# EAGLE board axiom_beta_plugin_module_TE0714_SATA_v0.5-default.05d97cfb (EAGLE 7.7.0)
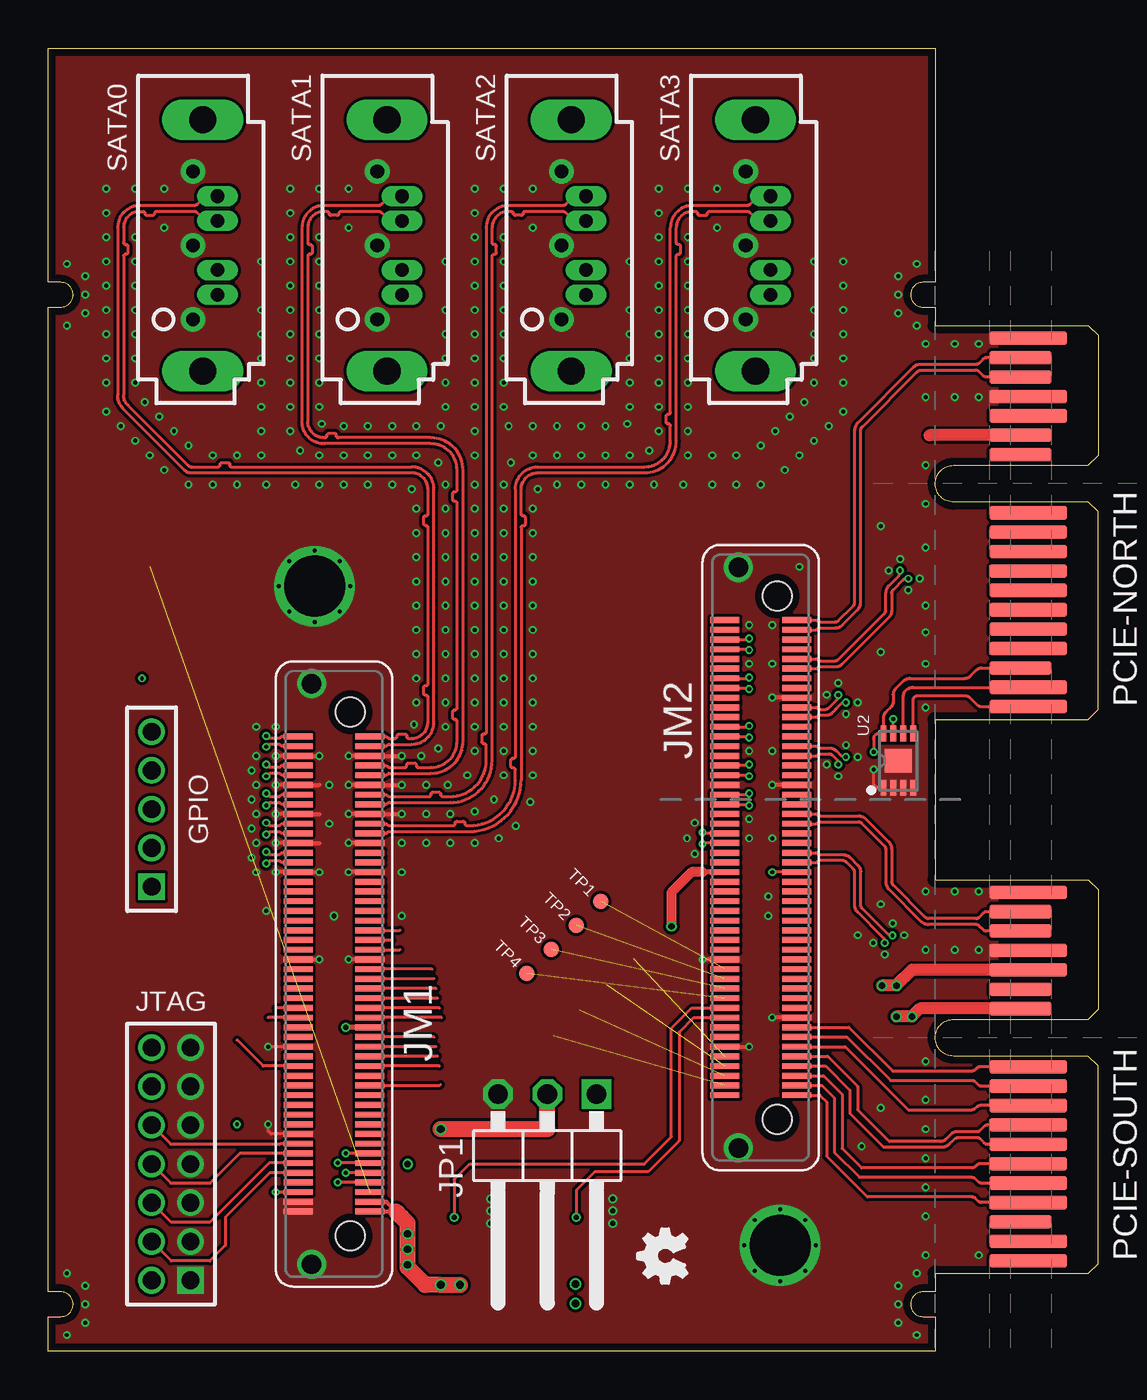
[diagram p0: board, top side]
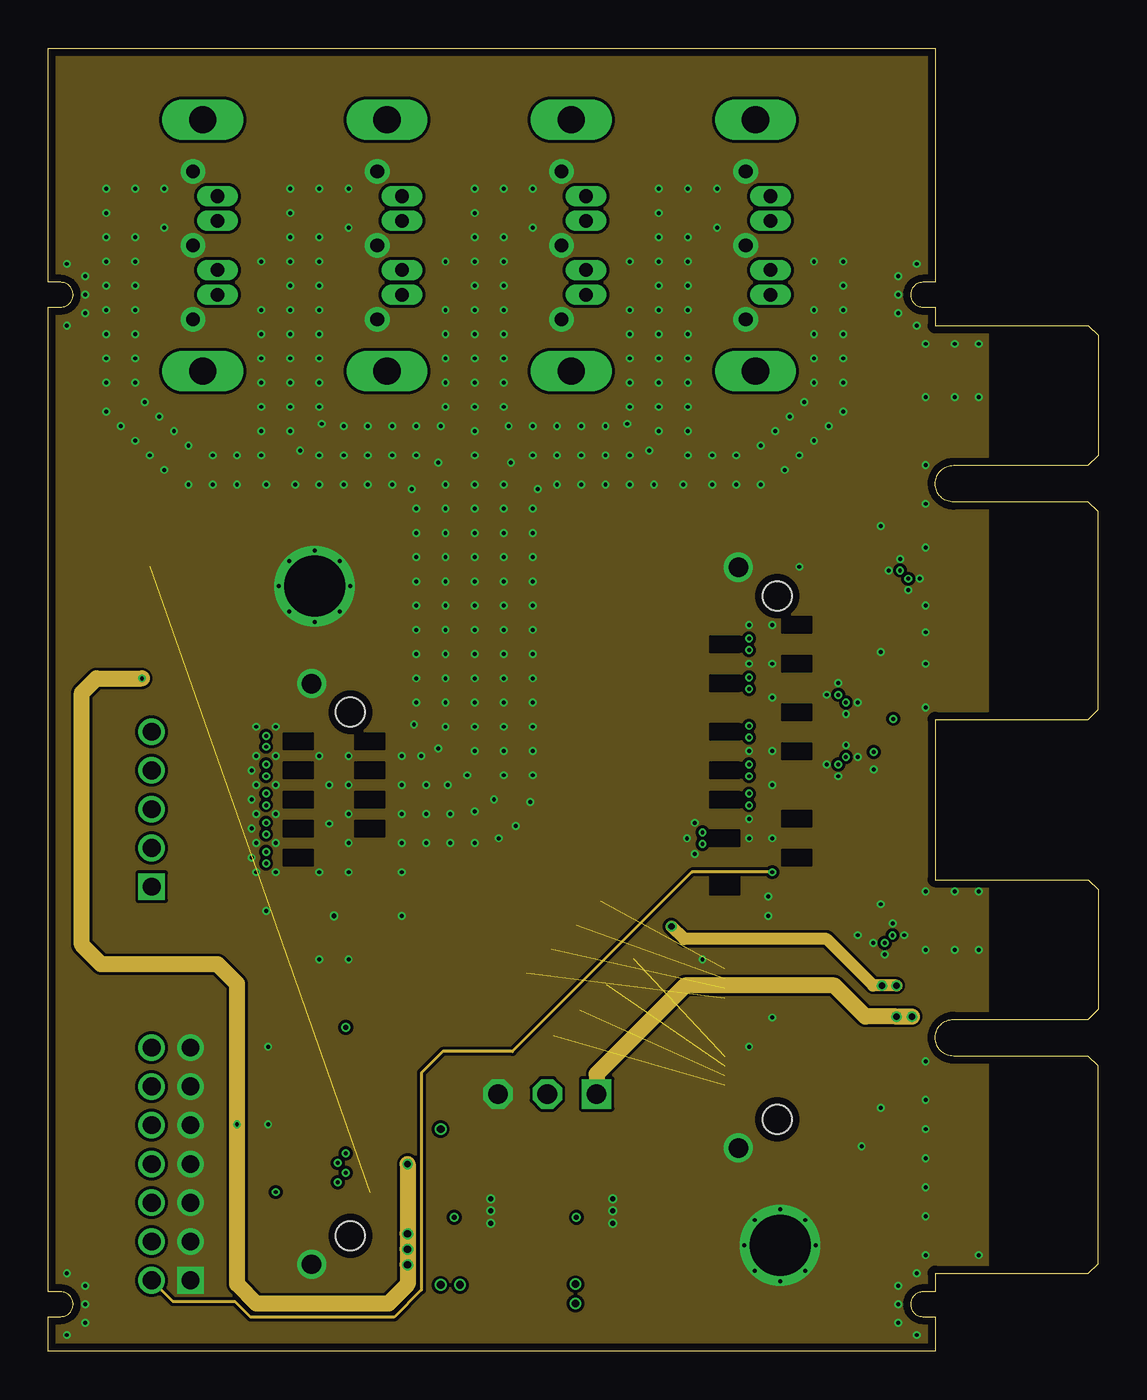
[diagram p1: board, inner layer Route2]
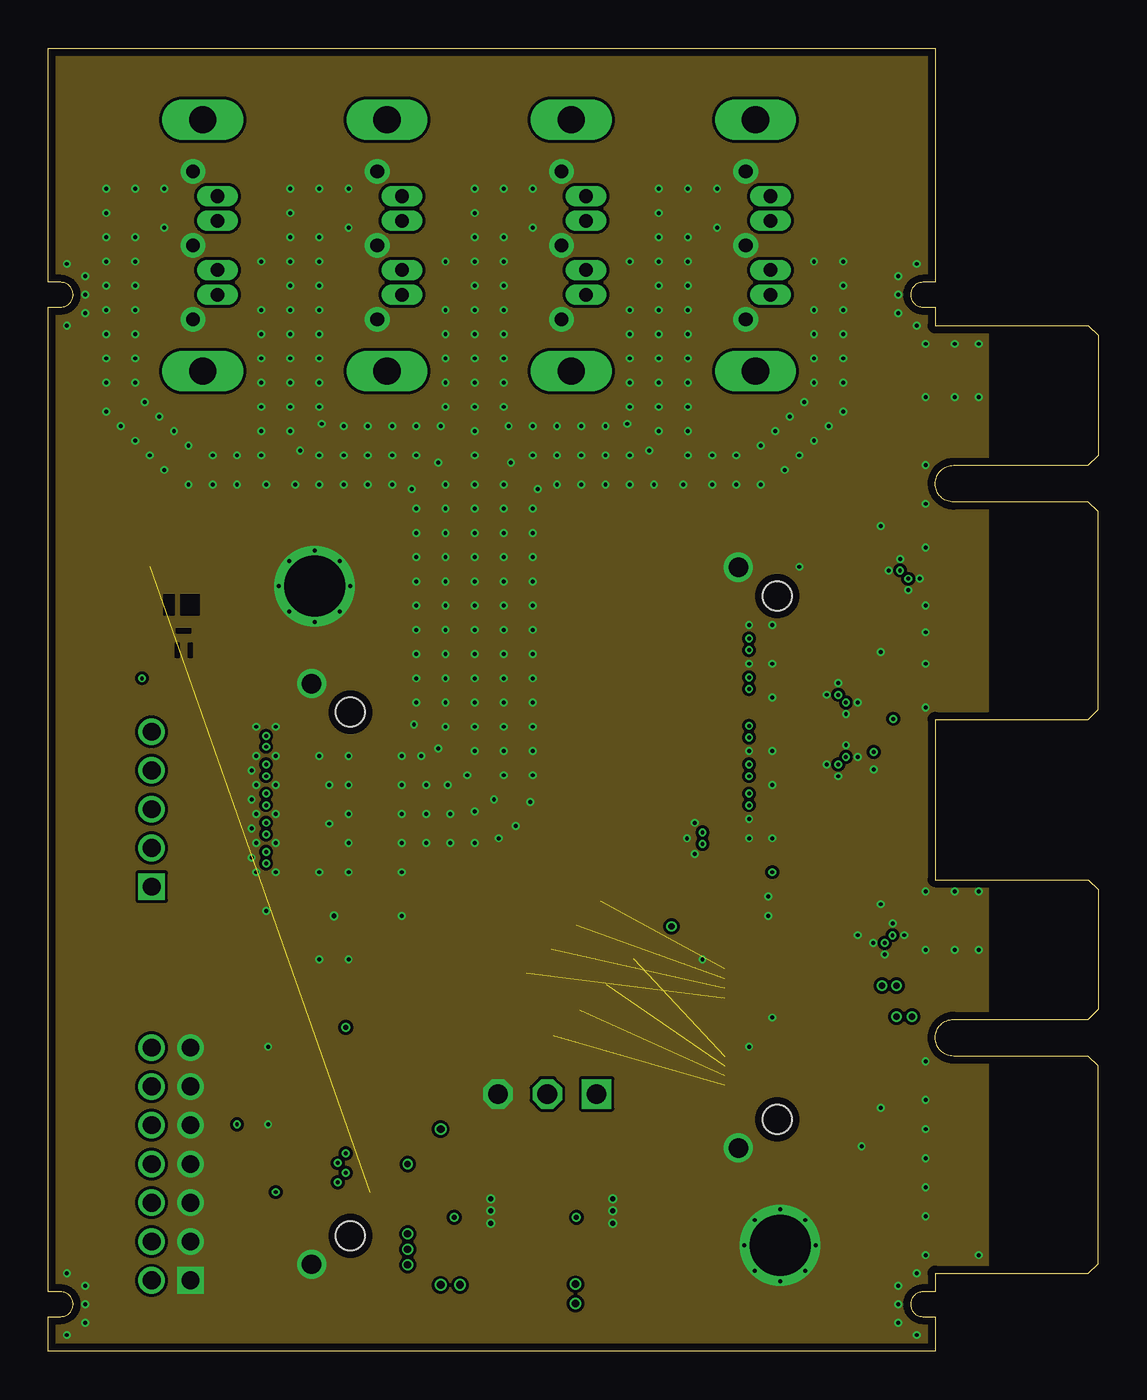
[diagram p2: board, inner layer Route15]
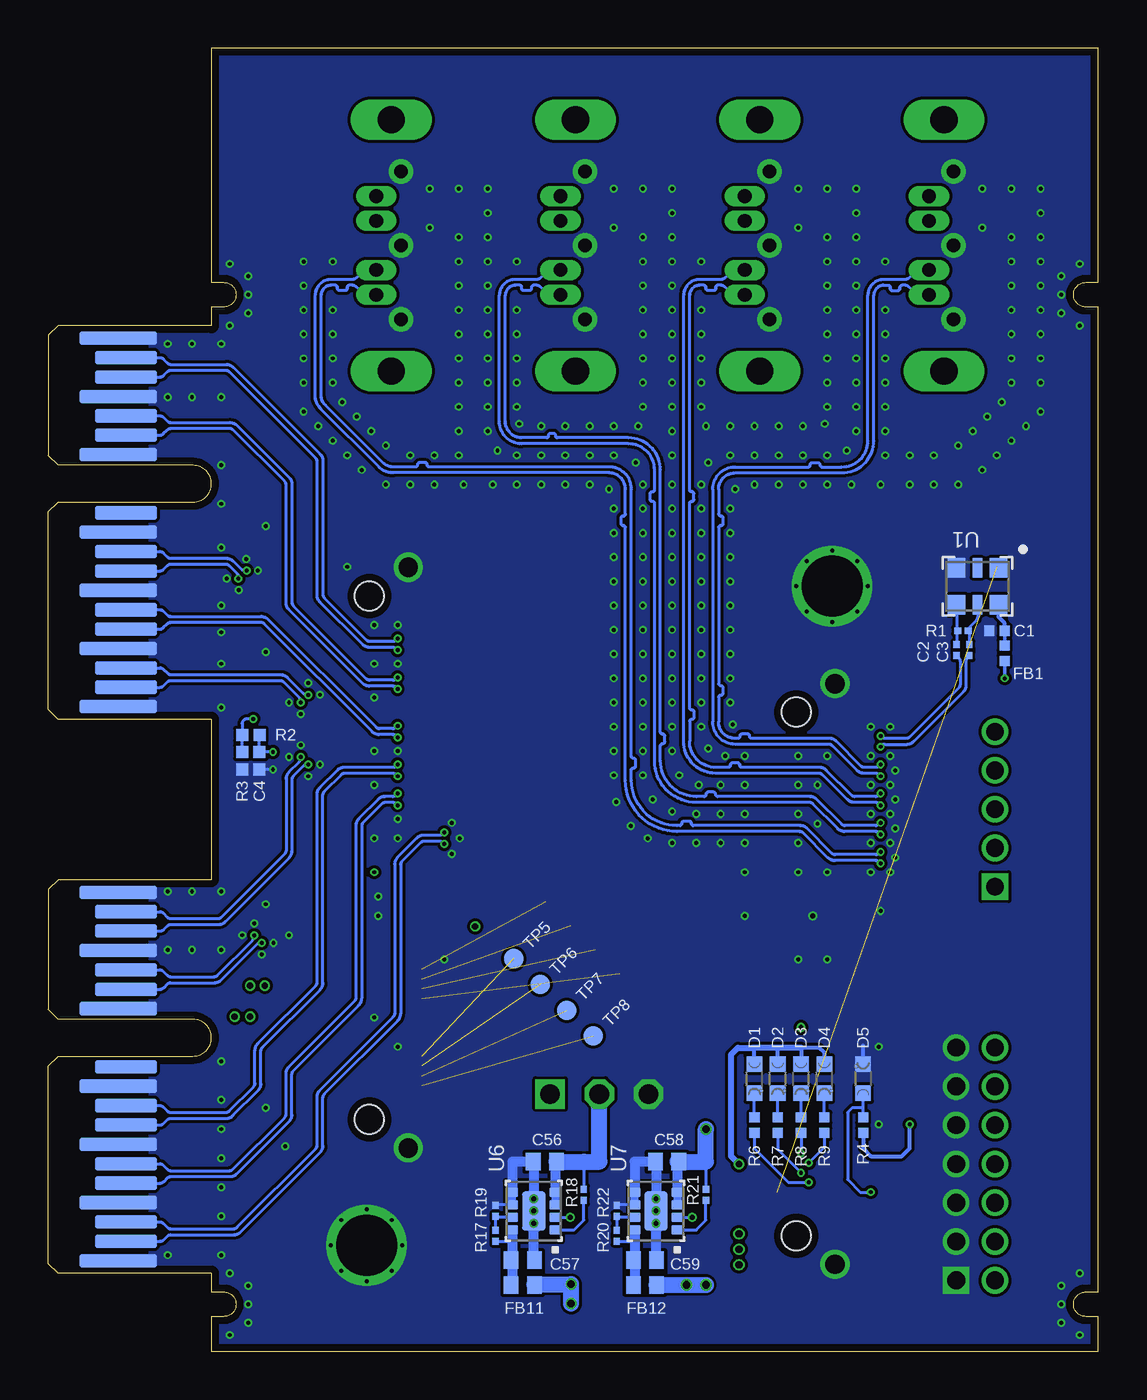
[diagram p3: board, bottom side, seen from below]

Size 54.12 x 67.18 mm. Coordinates in mm from the lower left corner, seen from the top.
Outline: 45.72,32.59 45.72,24.31
Outline: 45.72,52.89 45.72,53.85 45.09,53.85 arc-90 44.45,54.48 arc-90 45.09,55.12 45.72,55.12 45.72,67.18 0,67.18 0,55.12 0.63,55.12 arc-90 1.27,54.48 arc-90 0.63,53.85 0,53.85 0,3.05 0.63,3.05 arc-90 1.27,2.41 arc-90 0.63,1.78 0,1.78 0,0 45.72,0 45.72,1.78 45.09,1.78 arc-90 44.45,2.41 arc-90 45.09,3.05 45.72,3.05 45.72,4.01
Copper layers (1*2*15*16): Top 0.035559375mm / dielectric 0.17018125mm / Route2 0.01778125mm / dielectric 47mil / Route15 0.01778125mm / dielectric 0.17018125mm / Bottom 0.035559375mm
Design rules "OSHPark-4layer-tuned *": minimum track width 5mil, minimum drill 8mil, track to track 5mil, track to pad 5mil, pad to pad 5mil, via to via 5mil, smd to smd 5mil, copper to edge 15mil, drill to drill 6mil, minimum pad ring 4mil, minimum via ring 4mil, stop-mask expansion 2mil, vias tented up to drill 25mil, thermal gap 6mil
Net classes: 0 default: width 0.152 mm, drill 0.203 mm, clearance 0.152 mm; 1 LVDS: width 0.152 mm, drill 0.203 mm, clearance 0.152 mm; 2 75Ohm: width 0.178 mm, drill 0.203 mm, clearance 0.254 mm; 3 MGT: width 0.152 mm, drill 0.203 mm, clearance 0.356 mm
tKeepout: area 43.5,52.9 to 46.7,56.1; area 43.5,0.8 to 46.7,4; area -1,52.9 to 2.2,56.1; area -1,0.8 to 2.2,4
bKeepout: area 43.5,52.9 to 46.7,56.1; area 43.5,0.8 to 46.7,4; area -1,52.9 to 2.2,56.1; area -1,0.8 to 2.2,4

## Footprints (pad centres in the part's own frame; a part is rotated, then mirrored left to right if it is on the bottom)
0402-C = smd 0.52 x 0.52: 1 -0.4,0; 2 0.4,0
0201-C = smd 0.36 x 0.32: 1 -0.28,0; 2 0.28,0
0402-B = smd 0.62 x 0.62: 1 -0.45,0; 2 0.45,0
0603-C = smd 0.75 x 0.9: 1 -0.6,0; 2 0.6,0
CHIPLED_0603 = smd 0.8 x 0.8: A 0,-0.75; C 0,0.75
1X05M = drill 0.914 square: 1 -4,0 | drill 0.914: 2 -2,0; 3 0,0; 4 2,0; 5 4,0
LSHM-150-XX.X-XX-DV-A-S = smd 0.3 x 1.5: 1 12.25,-1.85; 2 12.25,1.85; 3 11.75,-1.85; 4 11.75,1.85; 5 11.25,-1.85; 6 11.25,1.85; 7 10.75,-1.85; 8 10.75,1.85; 9 10.25,-1.85; 10 10.25,1.85; 11 9.75,-1.85; 12 9.75,1.85; 13 9.25,-1.85; 14 9.25,1.85; 15 8.75,-1.85; 16 8.75,1.85; 17 8.25,-1.85; 18 8.25,1.85; 19 7.75,-1.85; 20 7.75,1.85; 21 7.25,-1.85; 22 7.25,1.85; 23 6.75,-1.85; 24 6.75,1.85; 25 6.25,-1.85; 26 6.25,1.85; 27 5.75,-1.85; 28 5.75,1.85; 29 5.25,-1.85; 30 5.25,1.85; 31 4.75,-1.85; 32 4.75,1.85; 33 4.25,-1.85; 34 4.25,1.85; 35 3.75,-1.85; 36 3.75,1.85; 37 3.25,-1.85; 38 3.25,1.85; 39 2.75,-1.85; 40 2.75,1.85; 41 2.25,-1.85; 42 2.25,1.85; 43 1.75,-1.85; 44 1.75,1.85; 45 1.25,-1.85; 46 1.25,1.85; 47 0.75,-1.85; 48 0.75,1.85; 49 0.25,-1.85; 50 0.25,1.85; 51 -0.25,-1.85; 52 -0.25,1.85; 53 -0.75,-1.85; 54 -0.75,1.85; 55 -1.25,-1.85; 56 -1.25,1.85; 57 -1.75,-1.85; 58 -1.75,1.85; 59 -2.25,-1.85; 60 -2.25,1.85; 61 -2.75,-1.85; 62 -2.75,1.85; 63 -3.25,-1.85; 64 -3.25,1.85; 65 -3.75,-1.85; 66 -3.75,1.85; 67 -4.25,-1.85; 68 -4.25,1.85; 69 -4.75,-1.85; 70 -4.75,1.85; 71 -5.25,-1.85; 72 -5.25,1.85; 73 -5.75,-1.85; 74 -5.75,1.85; 75 -6.25,-1.85; 76 -6.25,1.85; 77 -6.75,-1.85; 78 -6.75,1.85; 79 -7.25,-1.85; 80 -7.25,1.85; 81 -7.75,-1.85; 82 -7.75,1.85; 83 -8.25,-1.85; 84 -8.25,1.85; 85 -8.75,-1.85; 86 -8.75,1.85; 87 -9.25,-1.85; 88 -9.25,1.85; 89 -9.75,-1.85; 90 -9.75,1.85; 91 -10.25,-1.85; 92 -10.25,1.85; 93 -10.75,-1.85; 94 -10.75,1.85; 95 -11.25,-1.85; 96 -11.25,1.85; 97 -11.75,-1.85; 98 -11.75,1.85; 99 -12.25,-1.85; 100 -12.25,1.85 | drill 1 pad 1.5: F1 14.975,1.15; F2 -14.975,1.15 | hole 1.5: -13.5,-0.85; 13.5,-0.85
1X03/90-S = drill 1.016 square: 1 -2.54,-3.81 | drill 1.016 octagon: 2 0,-3.81; 3 2.54,-3.81
2X07M = drill 0.914 square: 1 -6,-1 | drill 0.914: 2 -6,1; 3 -4,-1; 4 -4,1; 5 -2,-1; 6 -2,1; 7 0,-1; 8 0,1; 9 2,-1; 10 2,1; 11 4,-1; 12 4,1; 13 6,-1; 14 6,1
PCIE-36-AXIOM = smd 0.7 x 4 bottom: A1 -11.5,3.6; A4 -8.5,3.6; A7 -5.5,3.6; A10 -2.5,3.6; A12 1.5,3.6; A15 4.5,3.6; A18 7.5,3.6 | smd 0.7 x 3.2 bottom: A2 -10.5,4; A3 -9.5,4; A5 -7.5,4; A6 -6.5,4; A8 -4.5,4; A9 -3.5,4; A11 -1.5,4; A13 2.5,4; A14 3.5,4; A16 5.5,4; A17 6.5,4 | smd 0.7 x 4: B1 -11.5,3.6; B2 -10.5,3.6; B4 -8.5,3.6; B5 -7.5,3.6; B6 -6.5,3.6; B7 -5.5,3.6; B8 -4.5,3.6; B9 -3.5,3.6; B10 -2.5,3.6; B11 -1.5,3.6; B14 3.5,3.6; B15 4.5,3.6; B18 7.5,3.6 | smd 0.7 x 3.2: B3 -9.5,4; B12 1.5,4; B13 2.5,4; B16 5.5,4; B17 6.5,4
SATA7-VERT = drill 0.7 pad 1.27: 1 3.81,-1.27; 4 0,-1.27; 7 -3.81,-1.27 | drill 0.7 pad 1 long: 2 2.54,0; 3 1.27,0; 5 -1.27,0; 6 -2.54,0 | drill 1.4 long: M1 -6.48,-0.77; M2 6.48,-0.77
TP08R = smd 0.8 x 0.8: TP 0,0
TP10R = smd 1 x 1: TP 0,0
3.2X2.5 = smd 0.9 x 1: 1 -1.075,-0.95; 3 1.075,-0.95; 4 1.075,0.95; 6 -1.075,0.95 | smd 0.5 x 1: 2 0,-0.95; 5 0,0.95
DFN200X300X100-9N = smd 0.813 x 0.305: 1 -1.397,0.762; 2 -1.397,0.254; 3 -1.397,-0.254; 4 -1.397,-0.762; 5 1.397,-0.762; 6 1.397,-0.254; 7 1.397,0.254; 8 1.397,0.762 | smd 1.194 x 1.397: EP 0,0
MICROSIP = smd 0.48 x 0.58: 1 -0.975,-1.1; 2 -0.325,-1.1; 3 0.325,-1.1; 4 0.975,-1.1; 5 0.975,1.1; 6 0.325,1.1; 7 -0.325,1.1; 8 -0.975,1.1 | smd 2 x 1.2: EP 0,0

## Placement (x,y rotation side)
C1  470n  [0402-C]  5.22,37.15 180 bottom
C2  100n  [0201-C]  7.3,36.15 270 bottom
C3  100n  [0201-C]  6.64,36.15 270 bottom
C4  [0402-B]  43.24,30.45 270 bottom
C56  [0603-C]  28.52,9.76 180 bottom
C57  [0603-C]  29.67,4.68 0 bottom
C58  [0603-C]  22.22,9.76 180 bottom
C59  [0603-C]  23.37,4.68 0 bottom
D1  LED  [CHIPLED_0603]  17.72,14.05 180 bottom
D2  LED  [CHIPLED_0603]  16.52,14.05 180 bottom
D3  LED  [CHIPLED_0603]  15.32,14.05 180 bottom
D4  LED  [CHIPLED_0603]  14.12,14.05 180 bottom
D5  LED  [CHIPLED_0603]  12.12,14.05 0 bottom
FB1  [0402-C]  4.82,36 90 bottom
FB11  [0603-C]  29.67,3.41 0 bottom
FB12  [0603-C]  23.37,3.41 0 bottom
GPIO  [1X05M]  5.32,27.95 90 top
JM1  LSHM-150-XX.X-XX-DV-A-S  [LSHM-150-XX.X-XX-DV-A-S]  14.72,19.45 90 top
JM2  LSHM-150-XX.X-XX-DV-A-S  [LSHM-150-XX.X-XX-DV-A-S]  36.72,25.45 90 top
JP1  [1X03/90-S]  25.72,9.45 180 top
JTAG  [2X07M]  6.32,9.65 90 top
LOGO2  OSHW_LOGO_FILLX0100-NT  [OSHW_FILLX100_NOTEXT]  32.92,3.49 90 top
PCIE-NORTH  PCIE-36-AXIOM  [PCIE-36-AXIOM]  54.12,44.74 90 top
PCIE-SOUTH  PCIE-36-AXIOM  [PCIE-36-AXIOM]  54.12,16.16 90 top
R1  100R  [0201-C]  6.97,37.15 0 bottom
R2  10k  [0402-B]  43.69,31.78 180 bottom
R3  1k  [0402-B]  44.13,30.45 270 bottom
R4  5k6  [0402-C]  12.12,11.65 270 bottom
R6  10k  [0402-C]  17.72,11.65 90 bottom
R7  10k  [0402-C]  16.52,11.65 90 bottom
R8  10k  [0402-C]  15.32,11.65 90 bottom
R9  10k  [0402-C]  14.12,11.65 90 bottom
R17  200k  [0201-C]  31.07,5.95 270 bottom
R18  10k  [0201-C]  26.52,8.05 90 bottom
R19  162k  [0201-C]  31.07,7.22 270 bottom
R20  510k  [0201-C]  24.82,5.95 270 bottom
R21  10k  [0201-C]  20.22,8.05 90 bottom
R22  162k  [0201-C]  24.82,7.22 270 bottom
SATA0  [SATA7-VERT]  8.72,57.02 270 top
SATA1  [SATA7-VERT]  18.22,57.02 270 top
SATA2  [SATA7-VERT]  27.72,57.02 270 top
SATA3  [SATA7-VERT]  37.22,57.02 270 top
TP1  TPTP08R  [TP08R]  28.47,23.18 0 top
TP2  TPTP08R  [TP08R]  27.2,21.95 0 top
TP3  TPTP08R  [TP08R]  25.93,20.72 0 top
TP4  TPTP08R  [TP08R]  24.66,19.49 0 top
TP5  TPTP10R  [TP10R]  30.14,20.24 0 bottom
TP6  TPTP10R  [TP10R]  28.77,18.91 0 bottom
TP7  TPTP10R  [TP10R]  27.4,17.58 0 bottom
TP8  TPTP10R  [TP10R]  26.03,16.25 0 bottom
U1  DSC11XX-3.2X2.5  [3.2X2.5]  6.22,39.45 180 bottom
U2  BR24G04NUX  [DFN200X300X100-9N]  43.81,30.45 90 top
U6  TPS82085  [MICROSIP]  29.1,7.22 90 bottom
U7  TPS82085  [MICROSIP]  22.8,7.22 90 bottom

## Library data of the parts
C1-C4 C56-C59 FB1 FB11 FB12 R1-R4 R6-R9 R17-R22 = generic-rcl
D1-D5 = led
GPIO JP1 JTAG = pinhead-2
JM1 JM2 = LSHM-150-XX.X-XX-DV-A-S
LOGO2 = ohw-logo
PCIE-NORTH PCIE-SOUTH = PCIe
SATA0 SATA1-SATA3 = sata
TP1-TP8 = testpad
U1 = dsc11xx
U2 = eeprom
U6 U7 = TPS82085

## Nets
1V8 [LVDS]: FB11.2
3V3 [LVDS]: D1.A D2.A D3.A D4.A FB1.1 FB12.2 JM1.97 JM1.99 R4.2
ADC_N: JM1.27
ADC_P: JM1.25
B14_L0: JM2.99 PCIE-SOUTH.B4
B14_L4_N: JM2.57
B14_L4_P: JM2.55
B14_L5_N: JM2.58
B14_L5_P: JM2.56
B14_L7_N: JM2.59
B14_L7_P: JM2.61
B14_L8_N: JM2.62
B14_L8_P: JM2.60
B14_L9_N: JM2.66
B14_L9_P: JM2.64
B14_L10_N: JM2.77
B14_L10_P: JM2.75
B14_L11_N: JM2.74 TP1.TP
B14_L11_P: JM2.76 TP2.TP
B14_L12_N: JM2.84 U6.2
B14_L12_P: JM2.82 U7.2
B14_L13_N: JM2.86
B14_L13_P: JM2.88
B14_L14_N: JM2.78 TP3.TP
B14_L14_P: JM2.80 TP4.TP
B14_L15_N: JM2.65
B14_L15_P: JM2.63
B14_L16_N: JM2.81
B14_L16_P: JM2.79
B14_L17_N: JM2.89 PCIE-SOUTH.B9
B14_L17_P: JM2.91 PCIE-SOUTH.B8
B14_L18_N: JM2.85 PCIE-SOUTH.B11
B14_L18_P: JM2.87 PCIE-SOUTH.B10
B14_L19_N: JM2.94 TP6.TP
B14_L19_P: JM2.92 TP5.TP
B14_L20_N: JM2.95 PCIE-SOUTH.B6
B14_L20_P: JM2.93 PCIE-SOUTH.B7
B14_L21_N: JM1.95 U1.1
B14_L21_P: JM1.93 R6.1
B14_L22_N: JM2.96 TP7.TP
B14_L22_P: JM2.98 TP8.TP
B14_L23_N: JM1.89 R9.1
B14_L23_P: JM1.91 R7.1
B14_L24_N: JM1.85
B14_L24_P: JM1.87 R8.1
B14_L25: JM2.97 PCIE-SOUTH.B5
B15_L1_N [LVDS]: JM2.14 PCIE-NORTH.A14
B15_L1_P [LVDS]: JM2.16 PCIE-NORTH.A13
B15_L2_N [LVDS]: JM2.20
B15_L2_P [LVDS]: JM2.22
B15_L3_N: JM2.4
B15_L3_P: JM2.2
B15_L4_N: JM2.10
B15_L4_P: JM2.12
B15_L5_N [LVDS]: JM2.8 PCIE-NORTH.A16
B15_L5_P [LVDS]: JM2.6 PCIE-NORTH.A17
B15_L6_N: JM2.26 PCIE-NORTH.A5
B15_L6_P: JM2.24 PCIE-NORTH.A6
B15_L7_N [LVDS]: JM2.1 PCIE-NORTH.B17
B15_L7_P [LVDS]: JM2.3 PCIE-NORTH.B16
B15_L8_N: JM2.7
B15_L8_P: JM2.5
B15_L9_N: JM2.15
B15_L9_P: JM2.13
B15_L10_N [LVDS]: JM2.11 PCIE-NORTH.A8
B15_L10_P [LVDS]: JM2.9 PCIE-NORTH.A9
B15_L11_N: JM2.30
B15_L11_P: JM2.28
B15_L12_N: JM2.34 PCIE-SOUTH.A8
B15_L12_P: JM2.32 PCIE-SOUTH.A9
B15_L13_N: JM2.38 PCIE-SOUTH.A6
B15_L13_P: JM2.40 PCIE-SOUTH.A5
B15_L14_N: JM2.42
B15_L14_P: JM2.44
B15_L15_N: JM2.19 PCIE-NORTH.A3
B15_L15_P: JM2.21 PCIE-NORTH.A2
B15_L16_N: JM2.23
B15_L16_P: JM2.25
B15_L17_N: JM2.31
B15_L17_P: JM2.33
B15_L18_N: JM2.27 PCIE-SOUTH.A17
B15_L18_P: JM2.29 PCIE-SOUTH.A16
B15_L19_N: JM2.41 PCIE-SOUTH.B17
B15_L19_P: JM2.43 PCIE-SOUTH.B16
B15_L20_N: JM2.50
B15_L20_P: JM2.52
B15_L21_N: JM2.45
B15_L21_P: JM2.47
B15_L22_N: JM2.46 PCIE-SOUTH.A3
B15_L22_P: JM2.48 PCIE-SOUTH.A2
B15_L23_N [LVDS]: JM2.51 PCIE-SOUTH.A13
B15_L23_P [LVDS]: JM2.49 PCIE-SOUTH.A14
B15_L24_N: JM2.37
B15_L24_P: JM2.39
B34_L1_N: JM1.37
B34_L1_P: JM1.35
B34_L2_N: JM1.33
B34_L2_P: JM1.31
B34_L3_N: JM1.42
B34_L3_P: JM1.40
B34_L4_N: JM1.41
B34_L4_P: JM1.39
B34_L5_N: JM1.45
B34_L5_P: JM1.43
B34_L6_N: JM1.34
B34_L6_P: JM1.32
B34_L7_N: JM1.38
B34_L7_P: JM1.36
B34_L8_N: JM1.52
B34_L8_P: JM1.50
B34_L9_N: JM1.46
B34_L9_P: JM1.44
B34_L10_N: JM1.51
B34_L10_P: JM1.49
B34_L11_N: JM1.53
B34_L11_P: JM1.55
B34_L12_N: JM1.57
B34_L12_P: JM1.59
B34_L13_N: JM1.56
B34_L13_P: JM1.54
B34_L14_N: JM1.60
B34_L14_P: JM1.58
B34_L15_N: JM1.62
B34_L15_P: JM1.64
B34_L16_N: JM1.68
B34_L16_P: JM1.70
B34_L17_N: JM1.63
B34_L17_P: JM1.65
B34_L18_N: JM1.74
B34_L18_P: JM1.72
B34_L19_N: JM1.71
B34_L19_P: JM1.73
B34_L20_N: JM1.76
B34_L20_P: JM1.78
B34_L21_N: JM1.69
B34_L21_P: JM1.67
B34_L22_N: JM1.75
B34_L22_P: JM1.77
B34_L23_N: JM1.79
B34_L23_P: JM1.81
B34_L24_N: JM1.80
B34_L24_P: JM1.82
BOOTMODE: JM2.100
DONE: D5.A JM1.96 R4.1
EN_A: R18.1 U6.1
EN_B: R21.1 U7.1
FB_A: R17.1 R19.2 U6.7
FB_B: R20.1 R22.2 U7.7
GND: C1.2 C4.2 C56.2 C57.2 C58.2 C59.2 D5.C JM1.5 JM1.6 JM1.11 JM1.12 JM1.17 JM1.18 JM1.23 JM1.24 JM1.29 JM1.30 JM1.47 JM1.48 JM1.66 JM1.84 JM1.98 JM1.100 JM1.F1 JM1.F2 JM2.17 JM2.35 JM2.36 JM2.72 JM2.83 JM2.90 JM2.F1 JM2.F2 JP1.3 JTAG.1 JTAG.3 JTAG.5 JTAG.7 JTAG.9 JTAG.11 JTAG.13 PCIE-NORTH.A1 PCIE-NORTH.A4 PCIE-NORTH.A7 PCIE-NORTH.A10 PCIE-NORTH.A12 PCIE-NORTH.A15 PCIE-NORTH.A18 PCIE-NORTH.B15 PCIE-NORTH.B18 PCIE-SOUTH.A1 PCIE-SOUTH.A4 PCIE-SOUTH.A7 PCIE-SOUTH.A10 PCIE-SOUTH.A12 PCIE-SOUTH.A15 PCIE-SOUTH.A18 PCIE-SOUTH.B15 PCIE-SOUTH.B18 R3.2 R19.1 R22.1 SATA0.1 SATA0.4 SATA0.7 SATA1.1 SATA1.4 SATA1.7 SATA2.1 SATA2.4 SATA2.7 SATA3.1 SATA3.4 SATA3.7 U1.3 U2.1 U2.2 U2.3 U2.4 U2.EP U6.5 U6.6 U6.EP U7.5 U7.6 U7.EP
I2C_V: C4.1 PCIE-NORTH.B3 R2.1 U2.8
M_1V8 [LVDS]: JM2.18
MGT_CLK0_N [LVDS]: C3.2 JM1.4
MGT_CLK0_P [LVDS]: C2.2 JM1.2
MGT_RX0_N [LVDS]: JM1.21 SATA3.5
MGT_RX0_P [LVDS]: JM1.19 SATA3.6
MGT_RX1_N [LVDS]: JM1.15 SATA2.5
MGT_RX1_P [LVDS]: JM1.13 SATA2.6
MGT_RX2_N [LVDS]: JM1.9 SATA1.5
MGT_RX2_P [LVDS]: JM1.7 SATA1.6
MGT_RX3_N [LVDS]: JM1.3 SATA0.5
MGT_RX3_P [LVDS]: JM1.1 SATA0.6
MGT_TX0_N [LVDS]: JM1.28 SATA3.3
MGT_TX0_P [LVDS]: JM1.26 SATA3.2
MGT_TX1_N [LVDS]: JM1.22 SATA2.3
MGT_TX1_P [LVDS]: JM1.20 SATA2.2
MGT_TX2_N [LVDS]: JM1.16 SATA1.3
MGT_TX2_P [LVDS]: JM1.14 SATA1.2
MGT_TX3_N [LVDS]: JM1.10 SATA0.3
MGT_TX3_P [LVDS]: JM1.8 SATA0.2
N$1 [LVDS]: D1.C R6.2
N$2 [LVDS]: D2.C R7.2
N$3 [LVDS]: D3.C R8.2
N$4 [LVDS]: D4.C R9.2
N$209: PCIE-NORTH.A11
N$216: R2.2 R3.1 U2.7
N$256: PCIE-SOUTH.A11
N_5V: PCIE-NORTH.B12
N_IO0: PCIE-NORTH.B4
N_IO1: PCIE-NORTH.B5
N_IO2: PCIE-NORTH.B6
N_IO3: PCIE-NORTH.B7
N_IO4 [LVDS]: PCIE-NORTH.B8
N_IO5 [LVDS]: PCIE-NORTH.B9
N_IO6: PCIE-NORTH.B10
N_IO7: PCIE-NORTH.B11
N_PCIE_V: PCIE-NORTH.B13
N_VCCIO: PCIE-NORTH.B14
OUT_N: C3.1 R1.2 U1.5
OUT_P: C2.1 R1.1 U1.4
PROG_B: JM1.94
S_5V: JP1.1 PCIE-SOUTH.B12
S_PCIE_V: PCIE-SOUTH.B13
S_VCCIO: JM2.54 PCIE-SOUTH.B14
SCL: PCIE-NORTH.B2 U2.6
SDA: PCIE-NORTH.B1 U2.5
SPI-CLK: JM2.67
SPI-CS: JM2.69
SPI-DQ0: JM2.68
SPI-DQ1: JM2.71
SPI-DQ2: JM2.73
SPI-DQ3: JM2.70
TCK: JM1.90 JTAG.6
TDI: JM1.86 JTAG.10
TDO: JM1.88 JTAG.8
TMS: JM1.92 JTAG.4
V_CLK: C1.1 FB1.2 U1.6
VCCIO0 [LVDS]: JM2.53 JTAG.2
VCCIO14 [LVDS]: JM1.83
VCCIO34 [LVDS]: JM1.61
VOUT_A: C57.1 FB11.1 R17.2 U6.8
VOUT_B: C59.1 FB12.1 R20.2 U7.8
VSUP [LVDS]: C56.1 C58.1 JP1.2 R18.2 R21.2 U6.3 U6.4 U7.3 U7.4

## Tracks (layer width: path | path; a pad name or v marks a point on that pad's centre or on a via)
1V8  (via drill 0.38)
  Bottom 0.813: FB11.2 29.07,3.45 v27.17,3.45 v27.17,2.45
3V3  (via drill 0.2, 0.33, 0.38, 0.4)
  Top 0.203: JM1.99 17.92,7.2 | JM1.97 17.42,7.7 18.22,6.9
  Top 0.813: 17.92,7.2 18.22,6.9 18.52,6.6 v18.52,6.05 v18.52,5.25 v18.52,4.45 18.52,4.31 19.42,3.41 v20.22,3.41 v21.22,3.41
  Route2 0.813: v18.52,9.65 v18.52,6.05 v18.52,5.25 v18.52,4.45 18.52,3.45 17.52,2.45 10.72,2.45 9.72,3.45 v9.72,11.7 9.72,18.95 8.72,19.95 2.72,19.95 1.72,20.95 1.72,33.95 2.47,34.7 v4.82,34.7
  Bottom 0.178: FB1.1 v4.82,34.7
  Bottom 0.203: R4.2 12.12,10.45 11.72,10.05 10.12,10.05 9.72,10.45 v9.72,11.7 | 17.82,15.65 17.72,15.65 D1.A | D4.A 14.12,15.4 14.37,15.65 15.32,15.65 D3.A | D2.A 16.52,15.65
  Bottom 0.305: 15.32,15.65 16.52,15.65 17.72,15.65 | v18.52,9.65 18.92,10.05 18.92,15.3 18.57,15.65 17.82,15.65
  Bottom 0.813: FB12.2 v21.22,3.41 v20.22,3.41
B14_L0
  Top 0.152: PCIE-SOUTH.B4 48.11,7.66 arc-45 47.93,7.73 47.79,7.88 arc45 47.62,7.95 42.22,7.95 40.12,10.05 40.12,12.85 39.77,13.2 JM2.99
B14_L11_N  (1 unrouted)
B14_L11_P  (1 unrouted)
B14_L12_N  (via drill 0.25)
  Top 0.152: v27.22,6.9 27.22,8.3 28.17,9.25 30.92,9.25 32.52,10.85 32.52,16.45 33.27,17.2 JM2.84
  Bottom 0.152: U6.2 v27.22,6.9
B14_L12_P  (via drill 0.25)
  Top 0.152: v20.92,6.9 20.92,8.85 21.72,9.65 30.72,9.65 32.12,11.05 32.12,16.65 33.17,17.7 JM2.82
  Bottom 0.152: U7.2 v20.92,6.9
B14_L14_N  (1 unrouted)
B14_L14_P  (1 unrouted)
B14_L17_N
  Top 0.152: PCIE-SOUTH.B9 48.04,12.66 arc45 47.86,12.59 47.79,12.52 arc-45 47.62,12.45 44.32,12.45 41.07,15.7 JM2.89
B14_L17_P
  Top 0.152: PCIE-SOUTH.B8 48.42,11.66 arc45 48.24,11.59 48.04,11.39 arc-45 47.87,11.31 46.86,11.31 arc45 46.51,11.17 46.27,10.93 arc-45 45.99,10.81 43.35,10.81 41.72,12.45 41.72,13.65 40.17,15.2 JM2.91
B14_L18_N
  Top 0.152: PCIE-SOUTH.B11 48.04,14.66 arc45 47.86,14.59 47.79,14.52 arc-45 47.62,14.45 43.52,14.45 41.27,16.7 JM2.85
B14_L18_P
  Top 0.152: PCIE-SOUTH.B10 48.11,13.66 arc-45 47.93,13.73 47.79,13.88 arc45 47.62,13.95 43.42,13.95 41.17,16.2 JM2.87
B14_L19_N  (1 unrouted)
B14_L19_P  (1 unrouted)
B14_L20_N
  Top 0.152: PCIE-SOUTH.B6 48.04,9.66 arc45 47.86,9.59 47.79,9.52 arc-45 47.62,9.45 41.92,9.45 40.92,10.45 40.92,13.25 39.97,14.2 JM2.95
B14_L20_P
  Top 0.152: PCIE-SOUTH.B7 48.42,10.66 arc-45 48.24,10.73 48.04,10.93 arc45 47.87,11.01 46.95,11.01 arc45 46.67,10.89 46.43,10.66 arc-45 46.08,10.51 43.06,10.51 41.32,12.25 41.32,13.45 40.07,14.7 JM2.93
B14_L21_N  (1 unrouted)
  Bottom 0.203: 5.22,40.47 U1.1
B14_L21_P  (via drill 0.2)
  Top 0.152: JM1.93 v14.92,8.7
  Bottom 0.152: R6.1 17.72,10.45 15.97,8.7 v14.92,8.7
B14_L22_N  (1 unrouted)
B14_L22_P  (1 unrouted)
B14_L23_N  (via drill 0.2)
  Top 0.152: JM1.89 v14.92,9.7
  Bottom 0.152: R9.1 14.12,10.5 v14.92,9.7
B14_L23_P  (via drill 0.2)
  Top 0.152: JM1.91 v15.32,9.2
  Bottom 0.152: R7.1 16.52,10.4 v15.32,9.2
B14_L24_P  (via drill 0.2)
  Top 0.152: JM1.87 v15.32,10.2
  Bottom 0.152: R8.1 v15.32,10.2
B14_L25
  Top 0.152: PCIE-SOUTH.B5 48.11,8.66 arc-45 47.93,8.73 47.79,8.88 arc45 47.62,8.95 41.82,8.95 40.52,10.25 40.52,13.05 39.87,13.7 JM2.97
B15_L1_N  (via drill 0.2)
  Top 0.152: JM2.14 36.07,34.7 v36.12,34.75
  Bottom 0.152: PCIE-NORTH.A14 48.37,48.24 arc45 48.19,48.16 47.99,47.96 arc-45 47.82,47.89 44.75,47.89 arc45 44.4,47.74 41.71,45.06 arc45 41.57,44.7 41.57,38.62 arc-45 41.49,38.44 37.73,34.67 arc-45 37.55,34.6 36.37,34.6 arc-45 36.19,34.67 v36.12,34.75
B15_L1_P  (via drill 0.2)
  Top 0.152: JM2.16 36.07,34.2 v36.12,34.15
  Bottom 0.152: PCIE-NORTH.A13 48.37,47.24 arc-45 48.19,47.31 47.99,47.51 arc45 47.82,47.58 44.77,47.58 arc45 44.6,47.51 41.95,44.86 arc45 41.87,44.68 41.87,38.59 arc-45 41.73,38.24 37.93,34.44 arc-45 37.58,34.3 36.37,34.3 arc45 36.19,34.22 v36.12,34.15
B15_L5_N  (via drill 0.2)
  Top 0.152: JM2.8 36.07,36.2 v36.12,36.15
  Bottom 0.152: PCIE-NORTH.A16 48.37,50.24 arc-45 48.19,50.31 47.99,50.51 arc45 47.82,50.58 44.97,50.58 arc45 44.8,50.51 40.35,46.06 arc45 40.27,45.88 40.27,38.99 arc-45 40.13,38.64 37.93,36.44 arc-45 37.58,36.3 36.37,36.3 arc45 36.19,36.22 v36.12,36.15
B15_L5_P  (via drill 0.2)
  Top 0.152: JM2.6 36.07,36.7 v36.12,36.75
  Bottom 0.152: PCIE-NORTH.A17 48.37,51.24 arc45 48.19,51.16 47.99,50.96 arc-45 47.82,50.89 44.95,50.89 arc45 44.6,50.74 40.11,46.26 arc45 39.97,45.9 39.97,39.02 arc-45 39.89,38.84 37.73,36.67 arc-45 37.55,36.6 36.37,36.6 arc-45 36.19,36.67 v36.12,36.75
B15_L6_N  (via drill 0.2)
  Top 0.152: JM2.26 36.07,31.7 v36.12,31.65
  Bottom 0.152: PCIE-NORTH.A5 48.37,37.23 arc-45 48.19,37.31 47.99,37.51 arc45 47.82,37.58 43.17,37.58 arc45 43,37.51 37.43,31.94 arc-45 37.08,31.8 36.37,31.8 arc45 36.19,31.72 v36.12,31.65
B15_L6_P  (via drill 0.2)
  Top 0.152: JM2.24 36.07,32.2 v36.12,32.25
  Bottom 0.152: PCIE-NORTH.A6 48.37,38.23 arc45 48.19,38.16 47.99,37.96 arc-45 47.82,37.89 43.15,37.89 arc45 42.8,37.74 37.23,32.17 arc-45 37.05,32.1 36.37,32.1 arc-45 36.19,32.17 v36.12,32.25
B15_L7_N
  Top 0.152: PCIE-NORTH.B17 48.37,51.24 arc45 48.19,51.16 47.99,50.96 arc-45 47.82,50.89 44.95,50.89 arc45 44.6,50.74 41.71,47.86 arc45 41.57,47.5 41.57,38.62 arc-45 41.49,38.44 40.73,37.67 arc-45 40.55,37.6 39.77,37.6 arc-45 39.68,37.64 39.66,37.66 arc45 39.57,37.7 JM2.1
B15_L7_P
  Top 0.152: PCIE-NORTH.B16 48.37,50.24 arc-45 48.19,50.31 47.99,50.51 arc45 47.82,50.58 44.97,50.58 arc45 44.8,50.51 41.95,47.66 arc45 41.87,47.48 41.87,38.59 arc-45 41.73,38.24 40.93,37.44 arc-45 40.58,37.3 39.77,37.3 arc45 39.68,37.26 39.66,37.23 arc-45 39.57,37.2 JM2.3
B15_L10_N  (via drill 0.2)
  Top 0.152: v44.34,39.83 44.24,39.84 arc47 44.05,39.76 43.55,39.26 arc45 43.47,39.08 43.47,38.19 arc-45 43.33,37.84 40.93,35.44 arc-45 40.58,35.3 39.77,35.3 arc45 39.68,35.26 39.66,35.23 arc-45 39.57,35.2 JM2.11
  Bottom 0.152: PCIE-NORTH.A8 48.37,40.23 arc-45 48.19,40.31 47.99,40.51 arc45 47.82,40.58 44.97,40.58 arc45 44.8,40.51 44.41,40.12 arc47 44.33,39.93 v44.34,39.83
B15_L10_P  (via drill 0.2)
  Top 0.152: v43.9,40.26 43.91,40.16 arc-47 43.84,39.98 43.31,39.46 arc45 43.17,39.1 43.17,38.22 arc-45 43.09,38.04 40.73,35.67 arc-45 40.55,35.6 39.77,35.6 arc-45 39.68,35.64 39.66,35.66 arc45 39.57,35.7 JM2.9
  Bottom 0.152: PCIE-NORTH.A9 48.37,41.23 arc45 48.19,41.16 47.99,40.96 arc-45 47.82,40.89 44.95,40.89 arc45 44.6,40.74 44.19,40.33 arc-47 44,40.26 v43.9,40.26
B15_L12_N  (via drill 0.2)
  Top 0.152: v36.12,29.65 36.07,29.7 JM2.34
  Bottom 0.152: PCIE-SOUTH.A8 48.36,11.66 arc-45 48.18,11.73 47.99,11.93 arc45 47.82,12 44.96,12 arc-45 44.61,12.14 43.31,13.44 arc-45 43.17,13.79 43.17,15.48 arc45 43.09,15.66 40.11,18.64 arc-45 39.97,18.99 39.97,28.68 arc45 39.89,28.86 39.03,29.72 arc45 38.85,29.8 36.37,29.8 arc45 36.19,29.72 v36.12,29.65
B15_L12_P  (via drill 0.2)
  Top 0.152: v36.12,30.25 36.07,30.2 JM2.32
  Bottom 0.152: PCIE-SOUTH.A9 48.38,12.66 arc45 48.2,12.59 47.99,12.38 arc-45 47.82,12.3 44.98,12.3 arc-45 44.81,12.38 43.55,13.64 arc-45 43.47,13.82 43.47,15.5 arc45 43.33,15.86 40.35,18.84 arc-45 40.27,19.02 40.27,28.7 arc45 40.13,29.06 39.23,29.95 arc45 38.88,30.1 36.37,30.1 arc-45 36.19,30.17 v36.12,30.25
B15_L13_N  (via drill 0.2)
  Top 0.152: JM2.38 36.07,28.7 v36.12,28.75
  Bottom 0.152: PCIE-SOUTH.A6 48.38,9.66 arc45 48.2,9.59 47.99,9.38 arc-45 47.82,9.3 44.78,9.3 arc-45 44.61,9.38 41.95,12.04 arc-45 41.87,12.21 41.87,14.3 arc45 41.73,14.66 38.35,18.04 arc-45 38.27,18.21 38.27,27.1 arc45 38.13,27.46 37.13,28.45 arc45 36.78,28.6 36.37,28.6 arc-45 36.19,28.67 v36.12,28.75
B15_L13_P  (via drill 0.2)
  Top 0.152: JM2.40 36.07,28.2 v36.12,28.15
  Bottom 0.152: PCIE-SOUTH.A5 48.36,8.66 arc-45 48.18,8.73 47.99,8.93 arc45 47.82,9 44.76,9 arc-45 44.41,9.14 41.71,11.84 arc-45 41.57,12.19 41.57,14.28 arc45 41.49,14.46 38.11,17.84 arc-45 37.97,18.19 37.97,27.08 arc45 37.89,27.26 36.93,28.22 arc45 36.75,28.3 36.37,28.3 arc45 36.19,28.22 v36.12,28.15
B15_L15_N  (via drill 0.2)
  Top 0.152: v40.72,33.85 40.72,33.75 arc-42 40.64,33.59 40.23,33.17 arc-45 40.05,33.1 39.77,33.1 arc-45 39.68,33.14 39.66,33.16 arc45 39.57,33.2 JM2.19
  Bottom 0.152: PCIE-NORTH.A3 48.37,35.23 arc45 48.19,35.16 47.99,34.96 arc-45 47.82,34.89 42.15,34.89 arc45 41.8,34.74 40.98,33.92 arc-42 40.82,33.85 v40.72,33.85
B15_L15_P  (via drill 0.2)
  Top 0.152: v41.12,33.45 41.02,33.45 arc42 40.86,33.37 40.63,33.14 40.58,33.1 40.43,32.94 arc-45 40.08,32.8 39.77,32.8 arc45 39.68,32.76 39.66,32.73 arc-45 39.57,32.7 JM2.21
  Bottom 0.152: v41.12,33.45 41.12,33.55 arc-42 41.2,33.71 42,34.51 arc-45 42.17,34.58 47.82,34.58 arc-45 47.99,34.51 48.19,34.31 arc45 48.37,34.23 PCIE-NORTH.A2
B15_L18_N  (via drill 0.2)
  Top 0.152: JM2.27 39.57,31.2 arc-45 39.66,31.16 39.68,31.14 arc45 39.77,31.1 40.28,31.1 arc-45 40.63,30.95 40.86,30.72 arc42 41.02,30.65 v41.12,30.65
  Bottom 0.152: PCIE-SOUTH.A17 48.38,22.66 arc45 48.2,22.59 47.99,22.38 arc-45 47.82,22.3 45.38,22.3 arc-45 45.21,22.38 41.95,25.64 arc-45 41.87,25.82 41.87,29.5 arc45 41.73,29.86 41.2,30.39 arc-42 41.12,30.55 v41.12,30.65
B15_L18_P  (via drill 0.2)
  Top 0.152: JM2.29 39.57,30.7 arc45 39.66,30.73 39.68,30.76 arc-45 39.77,30.8 40.25,30.8 arc-45 40.43,30.72 40.64,30.51 arc-42 40.72,30.34 v40.72,30.25
  Bottom 0.152: PCIE-SOUTH.A16 48.36,21.66 arc-45 48.18,21.73 47.99,21.93 arc45 47.82,22 45.36,22 arc-45 45.01,22.14 41.71,25.44 arc-45 41.57,25.79 41.57,29.48 arc45 41.49,29.66 40.98,30.17 arc42 40.82,30.25 v40.72,30.25
B15_L19_N
  Top 0.152: PCIE-SOUTH.B17 48.38,22.66 arc45 48.2,22.59 47.99,22.38 arc-45 47.82,22.3 45.38,22.3 arc-45 45.21,22.38 43.55,24.04 arc-45 43.47,24.21 43.47,25.9 arc45 43.33,26.26 42.13,27.45 arc45 41.78,27.6 39.77,27.6 arc-45 39.68,27.64 39.66,27.66 arc45 39.57,27.7 JM2.41
B15_L19_P
  Top 0.152: PCIE-SOUTH.B16 48.36,21.66 arc-45 48.18,21.73 47.99,21.93 arc45 47.82,22 45.36,22 arc-45 45.01,22.14 43.31,23.84 arc-45 43.17,24.19 43.17,25.88 arc45 43.09,26.06 41.93,27.22 arc45 41.75,27.3 39.77,27.3 arc45 39.68,27.26 39.66,27.23 arc-45 39.57,27.2 JM2.43
B15_L22_N  (via drill 0.2)
  Top 0.152: JM2.46 33.77,26.7 v33.72,26.75
  Bottom 0.152: PCIE-SOUTH.A3 48.38,6.66 arc45 48.2,6.59 47.99,6.38 arc-45 47.82,6.3 44.58,6.3 arc-45 44.41,6.38 40.35,10.44 arc-45 40.27,10.62 40.27,13.1 arc45 40.13,13.46 36.35,17.24 arc-45 36.27,17.41 36.27,25.1 arc45 36.13,25.46 35.13,26.45 arc45 34.78,26.6 33.97,26.6 arc-45 33.79,26.67 v33.72,26.75
B15_L22_P  (via drill 0.2)
  Top 0.152: JM2.48 33.77,26.2 v33.72,26.15
  Bottom 0.152: PCIE-SOUTH.A2 48.36,5.66 arc-45 48.18,5.73 47.99,5.93 arc45 47.82,6 44.56,6 arc-45 44.21,6.14 40.11,10.24 arc-45 39.97,10.59 39.97,13.08 arc45 39.89,13.26 36.11,17.04 arc-45 35.97,17.39 35.97,25.08 arc45 35.89,25.26 34.93,26.22 arc45 34.75,26.3 33.97,26.3 arc45 33.79,26.22 v33.72,26.15
B15_L23_N  (via drill 0.2)
  Top 0.152: JM2.51 39.57,25.2 arc45 39.66,25.23 39.68,25.26 arc-45 39.77,25.3 40.95,25.3 arc-45 41.13,25.22 41.49,24.86 arc-45 41.57,24.68 41.57,22.99 arc45 41.71,22.64 43.05,21.31 arc-42 43.12,21.14 v43.12,21.05
  Bottom 0.152: PCIE-SOUTH.A13 48.36,18.66 arc-45 48.18,18.73 47.99,18.93 arc45 47.82,19 45.56,19 arc-45 45.21,19.14 43.38,20.97 arc42 43.22,21.05 v43.12,21.05
B15_L23_P  (via drill 0.2)
  Top 0.152: JM2.49 39.57,25.7 arc-45 39.66,25.66 39.68,25.64 arc45 39.77,25.6 40.98,25.6 arc-45 41.33,25.45 41.73,25.06 arc-45 41.87,24.7 41.87,23.02 arc45 41.95,22.84 43.26,21.52 arc42 43.42,21.45 v43.52,21.45
  Bottom 0.152: PCIE-SOUTH.A14 48.38,19.66 arc45 48.2,19.59 47.99,19.38 arc-45 47.82,19.3 45.58,19.3 arc-45 45.41,19.38 43.59,21.19 arc-42 43.52,21.35 v43.52,21.45
B34_L4_N
  Top 0.152: JM1.41 18.12,21.7
B34_L5_N
  Top 0.152: JM1.45 18.12,20.7
B34_L5_P
  Top 0.152: JM1.43 17.72,21.2
B34_L10_N
  Top 0.152: 19.87,19.2 JM1.51
B34_L10_P
  Top 0.152: 19.77,19.7 JM1.49
B34_L11_N
  Top 0.152: 19.97,18.7 JM1.53
B34_L11_P
  Top 0.152: 20.07,18.2 JM1.55
B34_L12_N
  Top 0.152: 20.17,17.7 JM1.57
B34_L12_P
  Top 0.152: 20.27,17.2 JM1.59
B34_L14_N
  Top 0.152: JM1.60 11.32,17.2
B34_L14_P
  Top 0.152: JM1.58 11.72,17.7
B34_L16_P
  Top 0.152: JM1.70 11.07,14.7 9.72,16.05
B34_L17_N
  Top 0.152: 19.87,16.2 JM1.63
B34_L17_P
  Top 0.152: 19.97,15.7 JM1.65
B34_L19_P
  Top 0.152: JM1.73 20.17,13.7 20.22,13.75
B34_L21_N
  Top 0.152: 20.17,14.7 JM1.69
B34_L21_P
  Top 0.152: 20.07,15.2 JM1.67
DONE  (via drill 0.2)
  Top 0.152: JM1.96 v11.72,8.2
  Bottom 0.152: R4.1 12.12,12.55 | 12.12,12.55 D5.A | 12.12,12.55 12.67,12.55 12.92,12.3 12.92,8.85 12.27,8.2 v11.72,8.2
EN_A
  Bottom 0.152: U6.1 27.02,6.25 26.52,6.75 R18.1
EN_B
  Bottom 0.152: U7.1 20.72,6.25 20.22,6.75 R21.1
FB_A
  Bottom 0.152: R17.1 R19.2 31.07,6.9 U6.7
FB_B
  Bottom 0.152: U7.7 24.82,6.9 | 24.82,6.9 R22.2 | 24.82,6.9 R20.1
GND  (via drill 0.2, 0.25, 3.15)
  Top 0.152: JM1.84 11.47,11.2 11.32,11.35 v11.32,11.7 | JM1.66 v11.32,15.7 | U2.1 42.8,29.05 arc-90 42.55,29.3 v42.55,30
  Top 0.2: JM2.90 v36.12,15.7 | JM2.83 v37.32,17.2 | JM2.17 v37.32,33.7 | JM1.48 v13.97,20.2 | JM1.47 v15.47,20.2 | v13.97,30.7 JM1.6 v11.72,30.7 | 13.97,29.2 JM1.12 11.68,29.2 | 13.97,27.7 JM1.18 11.68,27.7 | 13.97,26.2 JM1.24 11.68,26.2 | v13.97,24.7 JM1.30 11.68,24.7 | JM1.29 v15.47,24.7 | JM1.23 v15.47,26.2 | v15.47,27.7 JM1.17 v18.22,27.7 | v15.47,29.2 JM1.11 v18.22,29.2 | v15.47,30.7 JM1.5 18.32,30.7 | JM2.72 v33.72,20.2 | JM2.35 v37.32,29.2
  Bottom 0.152: v42.55,30 C4.2 | U7.6 24.82,7.55 R22.1 | U6.6 31.07,7.55 R19.1
  Bottom 0.203: D5.C 12.12,15.75
  Bottom 0.305: U1.3 7.22,40.4 7.27,40.45
  Bottom 0.406: U6.6 U6.5 | U7.6 U7.5
  Bottom 0.508: C56.2 30.2,9.76 U6.5 | 29.1,4.68 v29.1,6.59 | 29.1,9.76 v29.1,7.86 | C58.2 23.9,9.76 U7.5 | 22.8,4.68 v22.8,6.59 | 22.8,9.76 v22.8,7.86
  Bottom 0.61: 29.1,4.68 C57.2 | 29.1,9.76 C56.2 | 22.8,4.68 C59.2 | 22.8,9.76 C58.2
  Bottom 1.016: v29.1,6.59 U6.EP v29.1,7.86 | v22.8,6.59 U7.EP v22.8,7.86
  other vias: 13.72,39.45 37.72,5.45 11.87,39.45 15.57,39.45 13.72,37.6 13.72,41.3 14.72,22.45 44.77,0.83 43.81,1.46 43.81,2.41 43.81,3.37 44.77,4 44.77,56.07 44.77,52.9 43.81,53.53 43.81,55.44 43.81,54.48 0.95,56.07 0.95,0.83 0.95,4 0.95,52.9 1.91,53.53 1.91,55.44 1.91,1.46 1.91,3.37 1.91,54.48 1.91,2.41 47.97,49.2 47.97,51.95 47.97,23.7 47.97,20.7 45.22,6.95 45.22,11.45 45.22,12.95 45.22,14.95 45.22,35.45 45.22,43.7 45.22,41.45 45.22,45.7 45.22,23.7 45.22,20.7 45.22,51.95 45.22,37.07 46.72,49.2 46.72,23.7 46.72,20.7 46.72,51.95 45.22,49.2 45.22,4.95 45.22,8.45 45.22,33.2 47.97,4.95 45.22,38.45 45.22,9.95 18.22,26.2 40.72,34.45 40.12,33.85 41.12,32.85 41.72,33.45 41.12,31.25 40.72,29.65 41.72,30.65 40.12,30.25 43.52,22.05 44.12,21.45 42.52,21.05 43.12,20.45 36.12,35.45 36.12,37.45 37.32,37.45 37.32,35.45 33.32,27.25 33.32,25.65 32.92,26.45 36.12,27.45 43.92,40.85 43.32,40.25 44.32,39.25 36.12,30.95 37.32,30.95 37.32,26.45 36.12,26.45 36.41,4.14 39.03,6.76 39.03,4.14 36.41,6.76 35.87,5.45 39.57,5.45 37.72,3.6 37.72,7.3 12.41,38.14 15.03,40.76 15.03,38.14 12.41,40.76 11.22,22.7 18.22,22.45 18.22,24.7 29.1,7.22 22.8,7.22 37.12,22.45 37.12,23.45 41.72,21.45 42.92,23.05 42.92,12.55 41.92,10.55 38.72,40.45 42.92,36.05 42.92,42.55 44.92,39.85 11.72,29.2 11.72,27.7 11.72,26.2 11.72,24.7 10.72,24.7 10.72,29.2 10.72,27.7 10.72,26.2 10.72,30.7 10.47,29.95 10.47,28.45 10.47,26.95 10.47,25.45 12.47,52.45 12.47,51.2 12.47,48.7 12.47,47.45 12.97,46.45 13.97,46.2 15.22,46.2 20.09,45.82 17.72,46.2 20.47,44.7 18.97,46.2 16.47,46.2 12.47,49.95 12.47,53.7 12.47,54.95 20.47,43.45 20.47,42.2 20.47,40.95 20.47,39.7 20.47,38.45 20.47,37.2 20.47,35.95 20.47,34.7 20.47,33.45 20.09,31.07 21.59,29.7 22.97,28.45 14.47,29.2 14.47,27.2 19.47,29.2 19.47,27.7 20.72,27.7 21.97,27.82 20.59,29.2 18.22,30.7 19.22,30.7 20.47,32.2 18.97,43.45 18.97,42.2 18.97,40.95 18.97,39.7 18.97,38.45 18.97,37.2 18.97,35.95 18.97,34.7 18.97,33.45 18.84,32.32 21.97,44.7 21.97,43.45 21.97,42.2 21.97,40.95 21.97,39.7 21.97,38.45 21.97,37.2 21.97,35.95 21.97,34.7 21.97,33.45 21.97,32.2 23.47,44.7 23.47,43.45 23.47,42.2 23.47,40.95 23.47,39.7 23.47,38.45 23.47,37.2 23.47,35.95 23.47,34.7 23.47,33.45 23.47,32.2 24.97,43.45 24.97,42.2 24.97,40.95 24.97,39.7 24.97,38.45 24.97,37.2 24.97,35.95 24.97,34.7 24.97,33.45 24.97,32.2 21.97,30.95 23.47,30.95 23.47,29.7 24.97,30.95 24.97,29.7 24.84,28.32 24.09,27.07 19.47,26.2 20.72,26.2 21.97,26.2 23.22,26.45 14.09,47.82 15.22,47.7 16.47,47.7 17.72,47.7 18.97,47.7 20.22,47.7 17.72,44.7 16.47,44.7 15.22,44.7 13.97,44.7 12.72,44.7 11.22,44.7 9.72,44.7 8.47,44.7 7.22,44.7 18.72,44.45 13.97,48.7 13.97,49.95 13.97,51.2 13.97,52.45 13.97,53.7 13.97,54.95 10.97,47.45 10.97,48.7 10.97,49.95 10.97,51.2 10.97,52.45 10.97,53.7 4.47,53.7 4.47,52.45 4.47,51.2 4.47,49.95 2.97,49.95 2.97,51.2 2.97,52.45 2.97,53.7 2.97,54.95 2.97,56.2 2.97,57.45 2.97,58.7 4.47,56.2 4.47,54.95 2.97,59.95 4.47,59.95 5.97,59.95 5.97,57.95 12.47,59.95 13.97,59.95 15.47,59.95 15.47,57.95 21.97,58.7 21.97,57.45 21.97,56.2 21.97,54.95 21.97,53.7 21.97,52.45 21.97,51.2 21.97,49.95 21.97,48.7 21.97,47.45 21.97,46.2 20.47,56.2 20.47,53.7 20.47,52.45 20.47,51.2 20.47,49.95 20.47,48.7 21.97,59.95 23.47,59.95 24.97,59.95 24.97,57.95 23.47,56.2 23.47,54.95 23.47,53.7 23.47,52.45 23.47,51.2 23.47,49.95 23.47,48.7 30.97,46.45 29.97,46.2 28.72,46.2 23.84,45.82 26.22,46.2 24.97,46.2 27.47,46.2 24.97,47.7 26.22,47.7 27.47,47.7 28.72,47.7 29.84,47.82 23.72,47.7 25.22,44.45 26.22,44.7 27.47,44.7 28.72,44.7 29.97,44.7 31.22,44.7 32.72,44.7 34.22,44.7 35.47,44.7 36.72,44.7 34.22,46.2 35.47,46.2 31.47,58.7 31.47,57.45 31.47,56.2 31.47,54.95 31.47,53.7 31.47,52.45 31.47,51.2 31.47,49.95 31.47,48.7 31.47,47.45 32.97,57.45 32.97,54.95 32.97,52.45 32.97,49.95 32.97,47.45 32.97,48.7 32.97,51.2 32.97,53.7 32.97,56.2 29.97,53.7 29.97,52.45 29.97,51.2 29.97,49.95 29.97,48.7 29.97,56.2 32.97,46.2 40.97,56.2 31.47,59.95 32.97,59.95 34.47,59.95 34.47,57.95 37.47,47.45 36.72,46.7 38.22,48.2 38.97,48.95 40.97,54.95 40.97,53.7 40.97,52.45 40.97,51.2 40.97,49.95 39.47,49.95 39.47,51.2 39.47,52.45 39.47,53.7 39.47,56.2 37.97,45.45 38.72,46.2 39.47,46.95 40.22,47.7 40.97,48.45 12.47,58.7 12.47,57.45 12.47,56.2 13.97,56.2 13.97,57.45 10.97,56.2 4.47,57.45 23.47,57.45 6.47,47.45 7.22,46.7 9.72,46.2 10.97,46.2 8.47,46.2 5.72,48.2 4.97,48.95 5.97,45.45 5.22,46.2 4.47,46.95 3.72,47.7 2.97,48.45 11.72,32.2 10.72,32.2
  pour Top (isolate 0.152, rank 3, no thermals): 0.02,67.18 45.72,67.18 45.72,53.21 48.89,53.21 48.89,3.68 45.72,3.68 45.72,0 0.02,0
  pour Bottom (isolate 0.152, no thermals): 0.02,67.18 45.72,67.18 45.72,53.21 48.89,53.21 48.89,3.68 45.72,3.68 45.72,0 0.02,0
  pour Route2 (isolate 0.152, rank 3, no thermals): 0.02,67.18 45.72,67.18 45.72,53.21 48.39,53.21 48.39,3.68 45.72,3.68 45.72,0 0.02,0
  pour Route15 (isolate 0.152, rank 3, no thermals): 0.02,67.18 45.72,67.18 45.72,53.21 48.39,53.21 48.39,3.68 45.72,3.68 45.72,0 0.02,0
I2C_V  (via drill 0.2)
  Top 0.152: v42.55,30.9 42.55,31.59 arc-90 42.8,31.84 U2.8 43.05,32.63 arc-45 43.2,32.98 43.41,33.2 arc45 43.56,33.55 43.56,33.83 arc-45 43.71,34.19 44.07,34.55 arc-45 44.42,34.7 47.26,34.7 arc45 47.53,34.81 47.84,35.12 arc-45 48.11,35.23 PCIE-NORTH.B3
  Bottom 0.152: v42.55,30.9 C4.1 R2.1
MGT_CLK0_N  (via drill 0.2)
  Top 0.152: JM1.4 12.08,31.2 arc-45 11.97,31.24 11.96,31.25 arc45 11.86,31.3 11.45,31.3 arc45 11.27,31.22 v11.22,31.17
  Bottom 0.152: C3.2 6.74,35.76 arc-45 6.82,35.59 6.82,34.34 arc45 6.96,33.99 9.51,31.44 arc45 9.86,31.3 10.99,31.3 arc-45 11.17,31.22 v11.22,31.17
MGT_CLK0_P  (via drill 0.2)
  Top 0.152: JM1.2 12.08,31.7 arc45 11.97,31.65 11.96,31.64 arc-45 11.86,31.6 11.45,31.6 arc-45 11.27,31.67 v11.22,31.73
  Bottom 0.152: C2.2 7.2,35.76 arc45 7.12,35.59 7.12,34.37 arc45 7.2,34.19 9.71,31.67 arc45 9.89,31.6 10.99,31.6 arc45 11.17,31.67 v11.22,31.73
MGT_RX0_N
  Top 0.152: JM1.21 17.36,26.7 arc45 17.47,26.74 17.48,26.75 arc-45 17.58,26.8 21.72,26.8 arc90 24.37,29.45 24.37,42.47 arc-90 24.47,42.57 24.49,42.57 arc90 24.59,42.67 24.59,42.97 arc90 24.49,43.07 24.47,43.07 arc-90 24.37,43.17 24.37,44.45 arc-90 25.22,45.3 30.72,45.3 arc90 32.37,46.95 32.37,56.47 arc-90 32.47,56.57 32.49,56.57 arc90 32.59,56.67 32.59,56.97 arc90 32.49,57.07 32.47,57.07 arc-90 32.37,57.17 32.37,57.95 arc-90 33.2,58.78 33.37,58.78 arc-90 33.47,58.68 33.47,58.67 arc90 33.57,58.57 33.87,58.57 arc90 33.97,58.67 33.97,58.68 arc-90 34.07,58.78 36,58.78 arc-45 36.18,58.7 36.59,58.29 SATA3.5
MGT_RX0_P
  Top 0.152: JM1.19 17.36,27.2 arc-45 17.47,27.15 17.48,27.14 arc45 17.58,27.1 20.87,27.1 arc90 20.97,27.2 20.97,27.22 arc-90 21.07,27.32 21.37,27.32 arc-90 21.47,27.22 21.47,27.2 arc90 21.57,27.1 21.72,27.1 arc90 24.07,29.45 24.07,29.97 arc90 23.97,30.07 23.95,30.07 arc-90 23.84,30.17 23.84,30.47 arc-90 23.95,30.57 23.97,30.57 arc90 24.07,30.67 24.07,44.45 arc-90 25.22,45.6 30.72,45.6 arc90 32.07,46.95 32.07,47.72 arc90 31.97,47.82 31.95,47.82 arc-90 31.84,47.92 31.84,48.22 arc-90 31.95,48.32 31.97,48.32 arc90 32.07,48.42 32.07,57.95 arc-90 33.2,59.08 36,59.08 arc45 36.18,59.15 36.59,59.56 SATA3.6
MGT_RX1_N
  Top 0.152: JM1.15 17.36,28.2 arc45 17.47,28.24 17.48,28.25 arc-45 17.58,28.3 20.72,28.3 arc90 22.87,30.45 22.87,56.47 arc-90 22.97,56.57 22.99,56.57 arc90 23.09,56.67 23.09,56.97 arc90 22.99,57.07 22.97,57.07 arc-90 22.87,57.17 22.87,57.95 arc-90 23.7,58.78 23.87,58.78 arc-90 23.97,58.68 23.97,58.67 arc90 24.07,58.57 24.37,58.57 arc90 24.47,58.67 24.47,58.68 arc-90 24.57,58.78 26.5,58.78 arc-45 26.68,58.7 27.09,58.29 SATA2.5
MGT_RX1_P
  Top 0.152: JM1.13 17.36,28.7 arc-45 17.47,28.65 17.48,28.64 arc45 17.58,28.6 19.62,28.6 arc90 19.72,28.7 19.72,28.72 arc-90 19.82,28.82 20.12,28.82 arc-90 20.22,28.72 20.22,28.7 arc90 20.32,28.6 20.72,28.6 arc90 22.57,30.45 22.57,31.22 arc90 22.47,31.32 22.45,31.32 arc-90 22.34,31.42 22.34,31.72 arc-90 22.45,31.82 22.47,31.82 arc90 22.57,31.92 22.57,57.95 arc-90 23.7,59.08 26.5,59.08 arc45 26.68,59.15 27.09,59.56 SATA2.6
MGT_RX2_N
  Top 0.152: JM1.9 17.36,29.7 arc45 17.47,29.74 17.48,29.75 arc-45 17.58,29.8 19.72,29.8 arc90 21.37,31.45 21.37,45.45 arc90 19.72,47.1 14.95,47.1 arc-90 14.84,47.2 14.84,47.22 arc90 14.74,47.32 14.45,47.32 arc90 14.34,47.22 14.34,47.2 arc-90 14.24,47.1 14.22,47.1 arc-90 13.37,47.95 13.37,56.47 arc-90 13.47,56.57 13.49,56.57 arc90 13.59,56.67 13.59,56.97 arc90 13.49,57.07 13.47,57.07 arc-90 13.37,57.17 13.37,57.95 arc-90 14.2,58.78 14.37,58.78 arc-90 14.47,58.68 14.47,58.67 arc90 14.57,58.57 14.87,58.57 arc90 14.97,58.67 14.97,58.68 arc-90 15.07,58.78 17,58.78 arc-45 17.18,58.7 17.59,58.29 SATA1.5
MGT_RX2_P
  Top 0.152: JM1.7 17.36,30.2 arc-45 17.47,30.15 17.48,30.14 arc45 17.58,30.1 18.37,30.1 arc90 18.47,30.2 18.47,30.22 arc-90 18.57,30.32 18.87,30.32 arc-90 18.97,30.22 18.97,30.2 arc90 19.07,30.1 19.72,30.1 arc90 21.07,31.45 21.07,32.47 arc90 20.97,32.57 20.95,32.57 arc-90 20.84,32.67 20.84,32.97 arc-90 20.95,33.07 20.97,33.07 arc90 21.07,33.17 21.07,43.72 arc90 20.97,43.82 20.95,43.82 arc-90 20.84,43.92 20.84,44.22 arc-90 20.95,44.32 20.97,44.32 arc90 21.07,44.42 21.07,45.45 arc90 19.72,46.8 14.22,46.8 arc-90 13.07,47.95 13.07,57.95 arc-90 14.2,59.08 17,59.08 arc45 17.18,59.15 17.59,59.56 SATA1.6
MGT_RX3_N
  Top 0.152: JM1.3 17.36,31.2 arc45 17.47,31.24 17.48,31.25 arc-45 17.58,31.3 18.72,31.3 arc90 19.87,32.45 19.87,44.45 arc90 18.72,45.6 9.45,45.6 arc-90 9.34,45.7 9.34,45.72 arc90 9.24,45.82 8.95,45.82 arc90 8.84,45.72 8.84,45.7 arc-90 8.74,45.6 7.39,45.6 arc-45 7.21,45.67 4.09,48.79 arc-45 3.87,49.32 3.87,56.47 arc-90 3.97,56.57 3.99,56.57 arc90 4.09,56.67 4.09,56.97 arc90 3.99,57.07 3.97,57.07 arc-90 3.87,57.17 3.87,57.95 arc-90 4.7,58.78 4.87,58.78 arc-90 4.97,58.68 4.97,58.67 arc90 5.07,58.57 5.37,58.57 arc90 5.47,58.67 5.47,58.68 arc-90 5.57,58.78 7.5,58.78 arc-45 7.68,58.7 8.09,58.29 SATA0.5
MGT_RX3_P
  Top 0.152: JM1.1 17.36,31.7 arc-45 17.47,31.65 17.48,31.64 arc45 17.58,31.6 17.87,31.6 arc90 17.97,31.7 17.97,31.72 arc-90 18.07,31.82 18.37,31.82 arc-90 18.47,31.72 18.47,31.7 arc90 18.57,31.6 18.72,31.6 arc90 19.57,32.45 19.57,33.72 arc90 19.47,33.82 19.45,33.82 arc-90 19.34,33.92 19.34,34.22 arc-90 19.45,34.32 19.47,34.32 arc90 19.57,34.42 19.57,42.47 arc90 19.47,42.57 19.45,42.57 arc-90 19.34,42.67 19.34,42.97 arc-90 19.45,43.07 19.47,43.07 arc90 19.57,43.17 19.57,44.45 arc90 18.72,45.3 7.36,45.3 arc-45 7.01,45.44 3.86,48.59 arc-45 3.57,49.3 3.57,57.95 arc-90 4.7,59.08 7.5,59.08 arc45 7.68,59.15 8.09,59.56 SATA0.6
MGT_TX0_N  (via drill 0.2)
  Top 0.152: JM1.28 12.08,25.2 arc-45 11.97,25.24 11.96,25.25 arc45 11.86,25.3 11.47,25.3 arc45 11.29,25.22 v11.22,25.15
  Bottom 0.152: v11.22,25.15 11.29,25.22 arc-45 11.47,25.3 13.58,25.3 arc45 13.93,25.44 15.21,26.72 arc-45 15.39,26.8 21.72,26.8 arc90 24.37,29.45 24.37,42.47 arc-90 24.47,42.57 24.49,42.57 arc90 24.59,42.67 24.59,42.97 arc90 24.49,43.07 24.47,43.07 arc-90 24.37,43.17 24.37,44.45 arc-90 25.22,45.3 36.37,45.3 arc45 37.08,45.59 40.08,48.59 arc45 40.37,49.3 40.37,54.45 arc90 39.55,55.27 38.44,55.27 arc-45 38.26,55.34 37.85,55.75 SATA3.3
MGT_TX0_P  (via drill 0.2)
  Top 0.152: JM1.26 12.08,25.7 arc45 11.97,25.65 11.96,25.64 arc-45 11.86,25.6 11.47,25.6 arc-45 11.29,25.67 v11.22,25.75
  Bottom 0.152: v11.22,25.75 11.29,25.67 arc45 11.47,25.6 13.55,25.6 arc45 13.73,25.67 15.01,26.95 arc-45 15.36,27.1 20.87,27.1 arc90 20.97,27.2 20.97,27.22 arc-90 21.07,27.32 21.37,27.32 arc-90 21.47,27.22 21.47,27.2 arc90 21.57,27.1 21.72,27.1 arc90 24.07,29.45 24.07,29.97 arc90 23.97,30.07 23.95,30.07 arc-90 23.84,30.17 23.84,30.47 arc-90 23.95,30.57 23.97,30.57 arc90 24.07,30.67 24.07,44.45 arc-90 25.22,45.6 34.49,45.6 arc90 34.59,45.7 34.59,45.72 arc-90 34.7,45.82 34.99,45.82 arc-90 35.09,45.72 35.09,45.7 arc90 35.2,45.6 36.35,45.6 arc45 36.88,45.82 39.85,48.79 arc45 40.07,49.32 40.07,54.45 arc90 39.55,54.97 39.32,54.97 arc90 39.22,54.87 39.22,54.8 arc-90 39.12,54.7 38.82,54.7 arc-90 38.72,54.8 38.72,54.87 arc90 38.62,54.97 38.44,54.97 arc45 38.26,54.89 37.85,54.48 SATA3.2
MGT_TX1_N  (via drill 0.2)
  Top 0.152: JM1.22 12.08,26.7 arc-45 11.97,26.74 11.96,26.75 arc45 11.86,26.8 11.47,26.8 arc45 11.29,26.72 v11.22,26.65
  Bottom 0.152: v11.22,26.65 11.29,26.72 arc-45 11.47,26.8 13.08,26.8 arc45 13.43,26.94 14.71,28.22 arc-45 14.89,28.3 20.72,28.3 arc90 22.87,30.45 22.87,43.72 arc-90 22.97,43.82 22.99,43.82 arc90 23.09,43.92 23.09,44.22 arc90 22.99,44.32 22.97,44.32 arc-90 22.87,44.42 22.87,45.45 arc-90 24.22,46.8 29.72,46.8 arc90 30.87,47.95 30.87,54.45 arc90 30.05,55.27 28.94,55.27 arc-45 28.76,55.34 28.35,55.75 SATA2.3
MGT_TX1_P  (via drill 0.2)
  Top 0.152: JM1.20 12.08,27.2 arc45 11.97,27.15 11.96,27.14 arc-45 11.86,27.1 11.47,27.1 arc-45 11.29,27.17 v11.22,27.25
  Bottom 0.152: v11.22,27.25 11.29,27.17 arc45 11.47,27.1 13.05,27.1 arc45 13.23,27.17 14.51,28.45 arc-45 14.86,28.6 19.62,28.6 arc90 19.72,28.7 19.72,28.72 arc-90 19.82,28.82 20.12,28.82 arc-90 20.22,28.72 20.22,28.7 arc90 20.32,28.6 20.72,28.6 arc90 22.57,30.45 22.57,31.22 arc90 22.47,31.32 22.45,31.32 arc-90 22.34,31.42 22.34,31.72 arc-90 22.45,31.82 22.47,31.82 arc90 22.57,31.92 22.57,45.45 arc-90 24.22,47.1 27.87,47.1 arc90 27.97,47.2 27.97,47.22 arc-90 28.07,47.32 28.24,47.32 arc-90 28.34,47.22 28.34,47.2 arc90 28.45,47.1 29.72,47.1 arc90 30.57,47.95 30.57,54.45 arc90 30.05,54.97 29.82,54.97 arc90 29.72,54.87 29.72,54.8 arc-90 29.62,54.7 29.32,54.7 arc-90 29.22,54.8 29.22,54.87 arc90 29.12,54.97 28.94,54.97 arc45 28.76,54.89 28.35,54.48 SATA2.2
MGT_TX2_N  (via drill 0.2)
  Top 0.152: JM1.16 12.08,28.2 arc-45 11.97,28.24 11.96,28.25 arc45 11.86,28.3 11.47,28.3 arc45 11.29,28.22 v11.22,28.15
  Bottom 0.152: v11.22,28.15 11.29,28.22 arc-45 11.47,28.3 12.58,28.3 arc45 12.93,28.44 14.21,29.72 arc-45 14.39,29.8 19.72,29.8 arc90 21.37,31.45 21.37,54.45 arc90 20.55,55.27 19.44,55.27 arc-45 19.26,55.34 18.85,55.75 SATA1.3
MGT_TX2_P  (via drill 0.2)
  Top 0.152: JM1.14 12.08,28.7 arc45 11.97,28.65 11.96,28.64 arc-45 11.86,28.6 11.47,28.6 arc-45 11.29,28.67 v11.22,28.75
  Bottom 0.152: v11.22,28.75 11.29,28.67 arc45 11.47,28.6 12.55,28.6 arc45 12.73,28.67 14.01,29.95 arc-45 14.36,30.1 18.37,30.1 arc90 18.47,30.2 18.47,30.22 arc-90 18.57,30.32 18.87,30.32 arc-90 18.97,30.22 18.97,30.2 arc90 19.07,30.1 19.72,30.1 arc90 21.07,31.45 21.07,32.48 arc90 20.97,32.58 20.95,32.58 arc-90 20.84,32.67 20.84,32.97 arc-90 20.95,33.07 20.97,33.07 arc90 21.07,33.17 21.07,43.72 arc90 20.97,43.82 20.95,43.82 arc-90 20.84,43.92 20.84,44.22 arc-90 20.95,44.32 20.97,44.32 arc90 21.07,44.42 21.07,54.45 arc90 20.55,54.97 20.32,54.97 arc90 20.22,54.87 20.22,54.8 arc-90 20.12,54.7 19.82,54.7 arc-90 19.72,54.8 19.72,54.87 arc90 19.62,54.97 19.44,54.97 arc45 19.26,54.89 18.85,54.48 SATA1.2
MGT_TX3_N  (via drill 0.2)
  Top 0.152: JM1.10 12.08,29.7 arc-45 11.97,29.74 11.96,29.75 arc45 11.86,29.8 11.47,29.8 arc45 11.29,29.72 v11.22,29.65
  Bottom 0.152: v11.22,29.65 11.29,29.72 arc-45 11.47,29.8 12.08,29.8 arc45 12.43,29.94 13.71,31.22 arc-45 13.89,31.3 18.72,31.3 arc90 19.87,32.45 19.87,44.45 arc90 18.72,45.6 14.95,45.6 arc-90 14.84,45.7 14.84,45.72 arc90 14.74,45.82 14.45,45.82 arc90 14.34,45.72 14.34,45.7 arc-90 14.24,45.6 13.22,45.6 arc-90 11.87,46.95 11.87,54.45 arc90 11.05,55.27 9.94,55.27 arc-45 9.76,55.34 9.35,55.75 SATA0.3
MGT_TX3_P  (via drill 0.2)
  Top 0.152: JM1.8 12.08,30.2 arc45 11.97,30.15 11.96,30.14 arc-45 11.86,30.1 11.47,30.1 arc-45 11.29,30.17 v11.22,30.25
  Bottom 0.152: v11.22,30.25 11.29,30.17 arc45 11.47,30.1 12.05,30.1 arc45 12.23,30.17 13.51,31.45 arc-45 13.86,31.6 17.87,31.6 arc90 17.97,31.7 17.97,31.72 arc-90 18.07,31.82 18.37,31.82 arc-90 18.47,31.72 18.47,31.7 arc90 18.57,31.6 18.72,31.6 arc90 19.57,32.45 19.57,33.72 arc90 19.47,33.82 19.45,33.82 arc-90 19.34,33.92 19.34,34.22 arc-90 19.45,34.32 19.47,34.32 arc90 19.57,34.42 19.57,42.47 arc90 19.47,42.57 19.45,42.57 arc-90 19.34,42.67 19.34,42.97 arc-90 19.45,43.07 19.47,43.07 arc90 19.57,43.17 19.57,44.45 arc90 18.72,45.3 13.22,45.3 arc-90 11.57,46.95 11.57,54.45 arc90 11.05,54.97 10.82,54.97 arc90 10.72,54.87 10.72,54.8 arc-90 10.62,54.7 10.32,54.7 arc-90 10.22,54.8 10.22,54.87 arc90 10.12,54.97 9.94,54.97 arc45 9.76,54.89 9.35,54.48 SATA0.2
N$1
  Bottom 0.152: R6.2 D1.C
N$2
  Bottom 0.152: R7.2 D2.C
N$3
  Bottom 0.152: R8.2 D3.C
N$4
  Bottom 0.152: R9.2 D4.C
N$5
  cutout Route2: 17.32,26.55 15.82,26.55 15.82,27.35 17.32,27.35
  cutout Route2: 17.32,28.05 15.82,28.05 15.82,28.85 17.32,28.85
  cutout Route2: 17.32,29.55 15.82,29.55 15.82,30.35 17.32,30.35
  cutout Route2: 17.32,31.05 15.82,31.05 15.82,31.85 17.32,31.85
  cutout Route2: 12.12,30.35 13.62,30.35 13.62,29.55 12.12,29.55
  cutout Route2: 12.12,28.85 13.62,28.85 13.62,28.05 12.12,28.05
  cutout Route2: 12.12,27.35 13.62,27.35 13.62,26.55 12.12,26.55
  cutout Route2: 12.12,25.85 13.62,25.85 13.62,25.05 12.12,25.05
  cutout Route2: 12.12,31.85 13.62,31.85 13.62,31.05 12.12,31.05
  cutout Route2: 34.12,24.35 35.62,24.35 35.62,23.55 34.12,23.55
  cutout Route2: 34.12,36.85 35.62,36.85 35.62,36.05 34.12,36.05
  cutout Route2: 34.12,34.85 35.62,34.85 35.62,34.05 34.12,34.05
  cutout Route2: 37.82,33.35 39.32,33.35 39.32,32.55 37.82,32.55
  cutout Route2: 37.82,31.35 39.32,31.35 39.32,30.55 37.82,30.55
  cutout Route2: 37.82,35.85 39.32,35.85 39.32,35.05 37.82,35.05
  cutout Route2: 37.82,37.85 39.32,37.85 39.32,37.05 37.82,37.05
  cutout Route2: 37.82,27.85 39.32,27.85 39.32,27.05 37.82,27.05
  cutout Route2: 37.82,25.85 39.32,25.85 39.32,25.05 37.82,25.05
  cutout Route2: 34.12,26.85 35.62,26.85 35.62,26.05 34.12,26.05
  cutout Route2: 34.12,28.85 35.62,28.85 35.62,28.05 34.12,28.05
  cutout Route2: 34.12,30.35 35.62,30.35 35.62,29.55 34.12,29.55
  cutout Route2: 34.12,32.35 35.62,32.35 35.62,31.55 34.12,31.55
N$6
  cutout Route15: 7.38,36.5 7.38,35.8 7.22,35.8 7.22,36.5
  cutout Route15: 6.72,36.5 6.72,35.8 6.56,35.8 6.56,36.5
  cutout Route15: 7.32,37.07 6.62,37.07 6.62,37.23 7.32,37.23
  cutout Route15: 7.74,39 7.74,38 6.84,38 6.84,39
  cutout Route15: 6.47,39 6.47,38 5.97,38 5.97,39
N$26
  cutout Bottom: 28.65,2.8 30.68,2.8 arc90 30.81,2.93 30.81,5.17 arc90 30.68,5.29 28.65,5.29 arc90 28.52,5.17 28.52,2.93 arc90
  cutout Bottom: 27.57,9.15 29.54,9.15 arc90 29.67,9.28 29.67,10.25 arc90 29.54,10.37 27.57,10.37 arc90 27.45,10.25 27.45,9.28 arc90
  cutout Bottom: 21.21,9.15 23.24,9.15 arc90 23.37,9.28 23.37,10.25 arc90 23.24,10.37 21.21,10.37 arc90 21.08,10.25 21.08,9.28 arc90
  cutout Bottom: 22.35,2.8 24.38,2.8 arc90 24.51,2.93 24.51,5.17 arc90 24.38,5.29 22.35,5.29 arc90 22.22,5.17 22.22,2.93 arc90
  cutout Bottom: 27.64,5.53 30.56,5.53 arc90 30.68,5.66 30.68,8.72 arc90 30.56,8.91 27.64,8.91 arc90 27.51,8.79 27.51,5.66 arc90
  cutout Bottom: 21.4,5.6 24.19,5.6 arc90 24.32,5.72 24.32,8.72 arc90 24.19,8.85 21.4,8.85 arc90 21.27,8.72 21.27,5.72 arc90
N$216  (via drill 0.2)
  Top 0.152: U2.7 v43.56,32.61
  Bottom 0.152: R3.1 R2.2 44.14,32.35 arc90 43.88,32.61 v43.56,32.61
N_PCIE_V
  Top 0.61: PCIE-NORTH.B13 45.43,47.24
OUT_N
  Bottom 0.152: U1.5 6.22,37.85 arc45 6.29,37.67 6.64,37.33 6.64,37.1 | 6.67,37.17 R1.2 6.64,37.1 | 6.64,37.1 C3.1
OUT_P
  Bottom 0.152: U1.4 7.3,38.38 7.3,37.2 R1.1 7.3,37.1 C2.1
S_5V  (via drill 0.33)
  Top 0.61: v43.72,17.25 v44.52,17.25 44.93,17.66 PCIE-SOUTH.B12
  Route2 0.813: JP1.1 28.26,14.29 32.82,18.85 40.52,18.85 42.12,17.25 v43.72,17.25 v44.52,17.25
S_VCCIO  (via drill 0.33)
  Top 0.254: JM2.54 33.72,24.7
  Top 0.508: 33.72,24.7 33.17,24.7 32.12,23.65 v32.12,21.9
  Top 0.61: PCIE-SOUTH.B14 44.53,19.66 v43.72,18.85 v42.97,18.85
  Route2 0.61: v43.72,18.85 42.52,18.85 40.12,21.25 32.77,21.25 v32.12,21.9
SCL
  Top 0.152: U2.6 44.07,33.73 arc-90 44.58,34.23 PCIE-NORTH.B2
SDA
  Top 0.152: U2.5 44.57,33.55 arc-90 44.83,33.8 47.24,33.8 arc-45 47.51,33.69 47.86,33.35 arc45 48.13,33.23 PCIE-NORTH.B1
TCK
  Top 0.152: JM1.90 11.37,9.7 8.32,6.65 6.32,6.65 JTAG.6
TDI
  Top 0.152: JM1.86 11.97,10.7 11.92,10.65 6.32,10.65 JTAG.10
TDO
  Top 0.152: JM1.88 9.87,10.2 8.32,8.65 6.32,8.65 JTAG.8
TMS
  Top 0.152: JM1.92 11.42,9.2 9.12,6.9 9.12,5.45 8.32,4.65 6.32,4.65 JTAG.4
V_CLK
  Bottom 0.178: C1.1 FB1.2
  Bottom 0.203: C1.1 4.82,37.55 5.14,37.87 U1.6
VCCIO0  (via drill 0.2)
  Top 0.152: JM2.53 v37.32,24.7
  Route2 0.152: v37.32,24.7 33.17,24.7 23.92,15.45 20.32,15.45 19.22,14.35 19.22,3.15 17.82,1.75 10.42,1.75 9.62,2.55 6.42,2.55 JTAG.2
VCCIO34  (via drill 0.25)
  Top 0.254: JM1.61 v15.32,16.7
VOUT_A
  Bottom 0.152: R17.2 30.2,5.67 U6.8
  Bottom 0.406: U6.8 30.2,6.12
  Bottom 0.508: 30.2,6.12 30.2,4.68 | 30.2,4.68 C57.1 | 30.2,4.68 30.2,3.48 FB11.1
VOUT_B
  Bottom 0.152: R20.2 23.9,5.67 U7.8
  Bottom 0.406: U7.8 23.9,6.12
  Bottom 0.508: 23.9,6.12 23.9,4.68 | 23.9,4.68 C59.1 | 23.9,4.68 23.9,3.48 FB12.1
VSUP  (via drill 0.4)
  Top 0.813: v20.22,11.45 25.72,11.45 JP1.2
  Bottom 0.152: 20.22,9.76 R21.2 | 26.52,9.76 R18.2
  Bottom 0.406: U7.4 U7.3 | U6.4 U6.3
  Bottom 0.508: C58.1 21.7,9.76 U7.4 | C56.1 28,9.76 U6.4
  Bottom 0.813: C56.1 26.52,9.76 25.72,9.76 JP1.2 | 21.7,9.76 20.22,9.76 v20.22,11.45

## Text on the board
_tsilk: V0.5 / R1.0 | Axiom Beta | SATA | Dual Plugin / Module | GND | 5V0 | B5V | TDI | TDO | TCK | Copyright (C) 2019 Herbert Pötzl / Licensed under CERN OHL v.1.2 | TMS
bEngrave: AXIOM BETA DPM TE0714 SATA / BOTTOM SIDE V0.5 R1.0